# Allegro board T31_QFN_SC4335_38_V1.0_190823E.brd
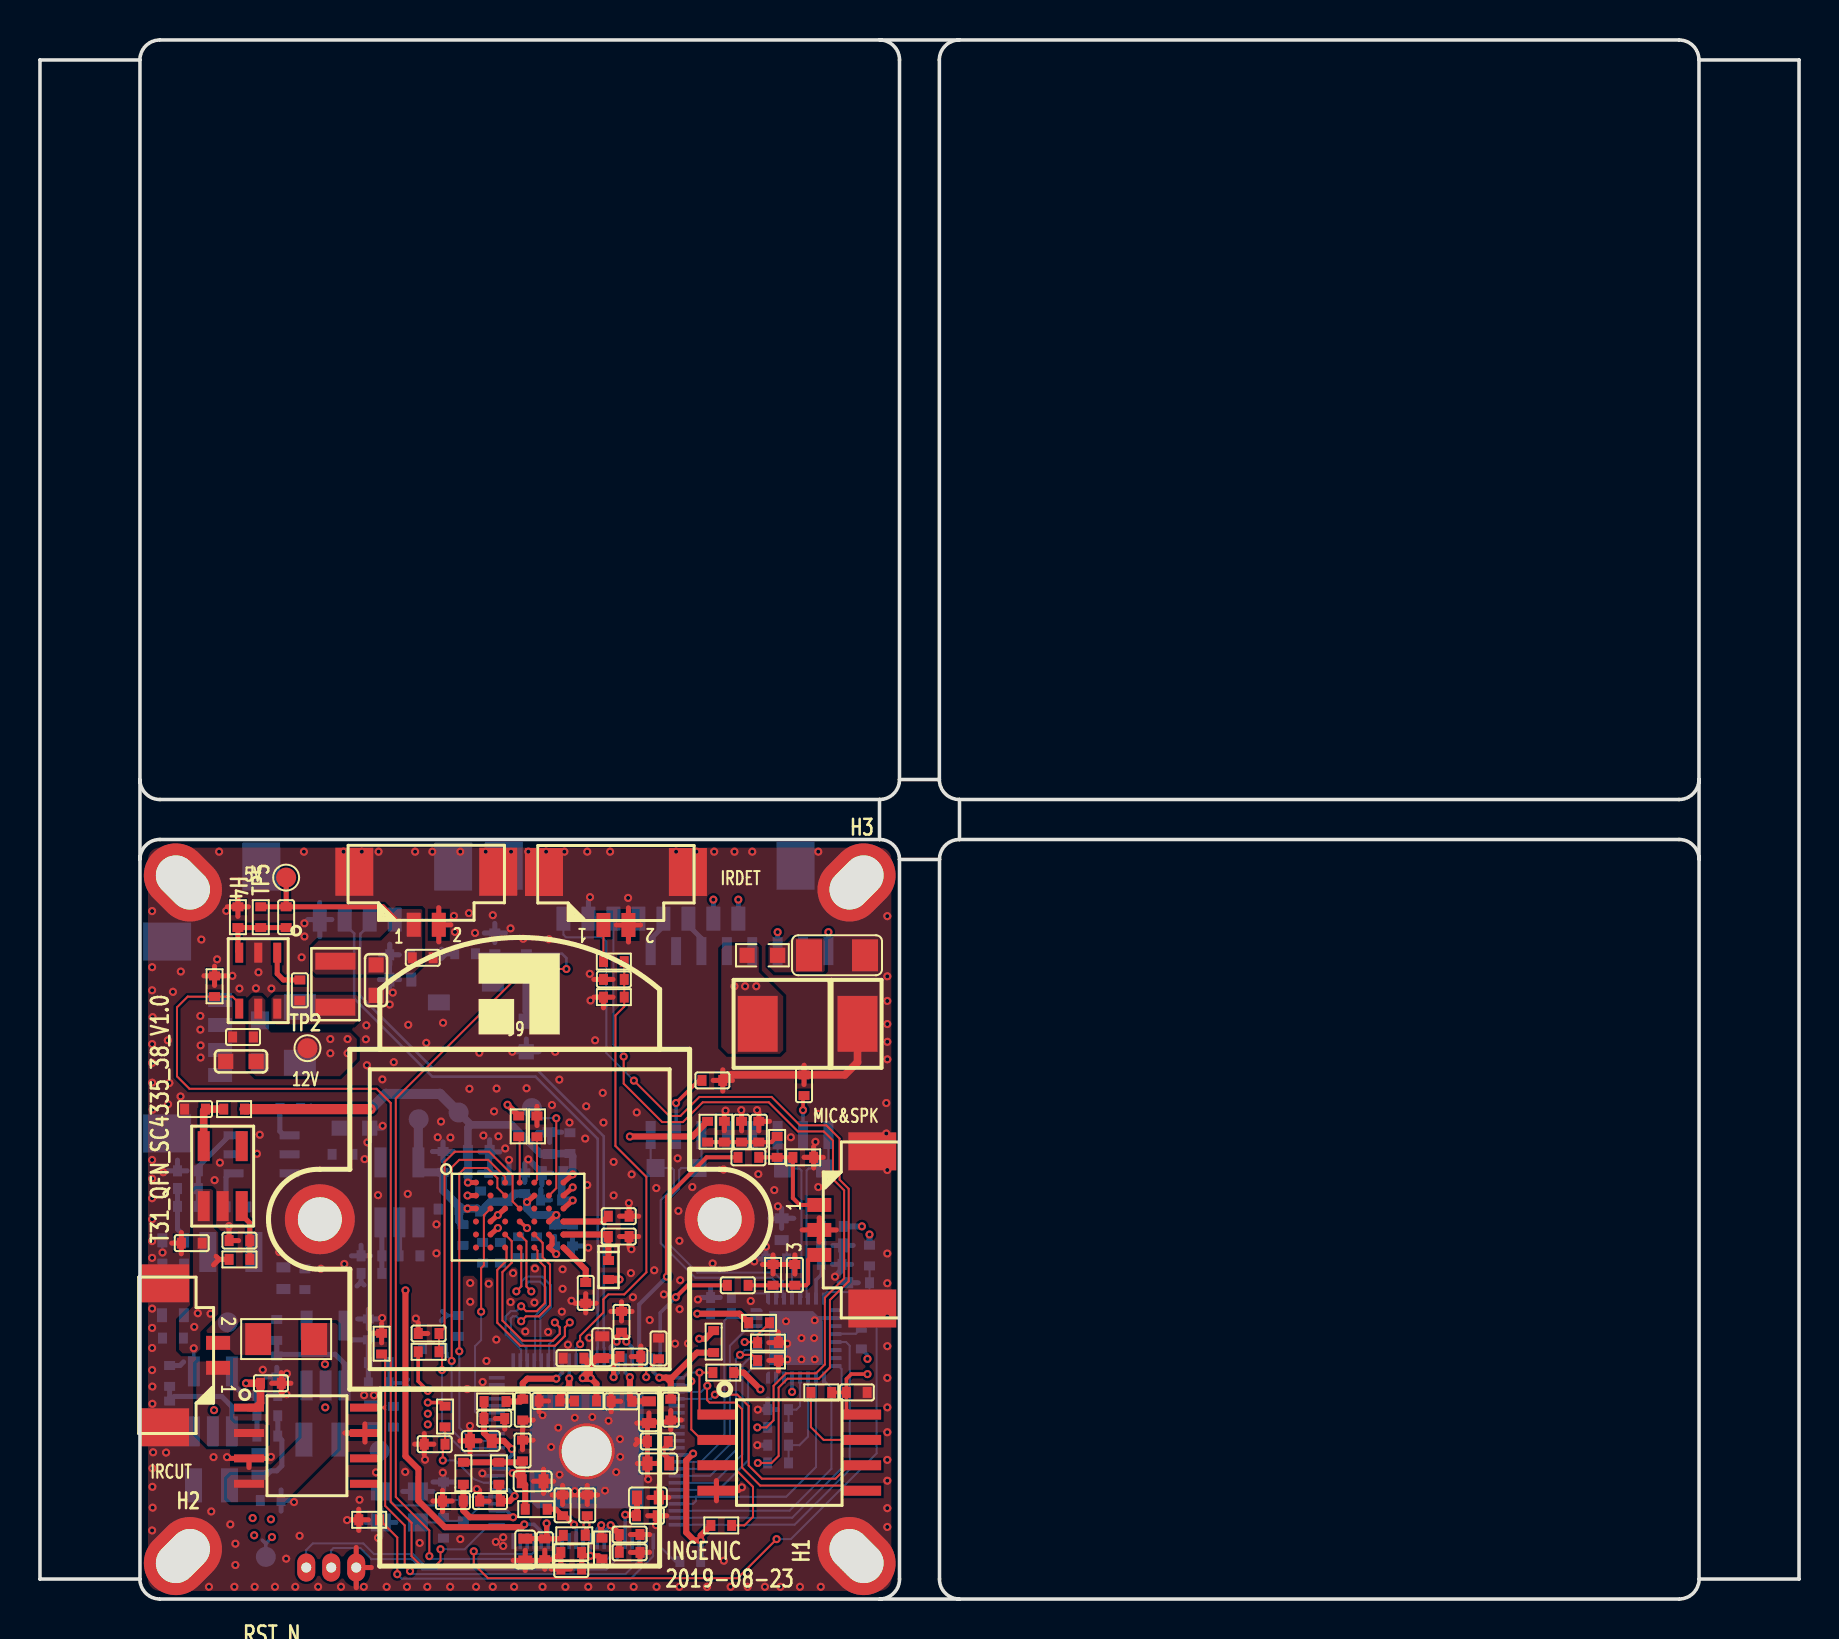
[diagram p0: board, top side]
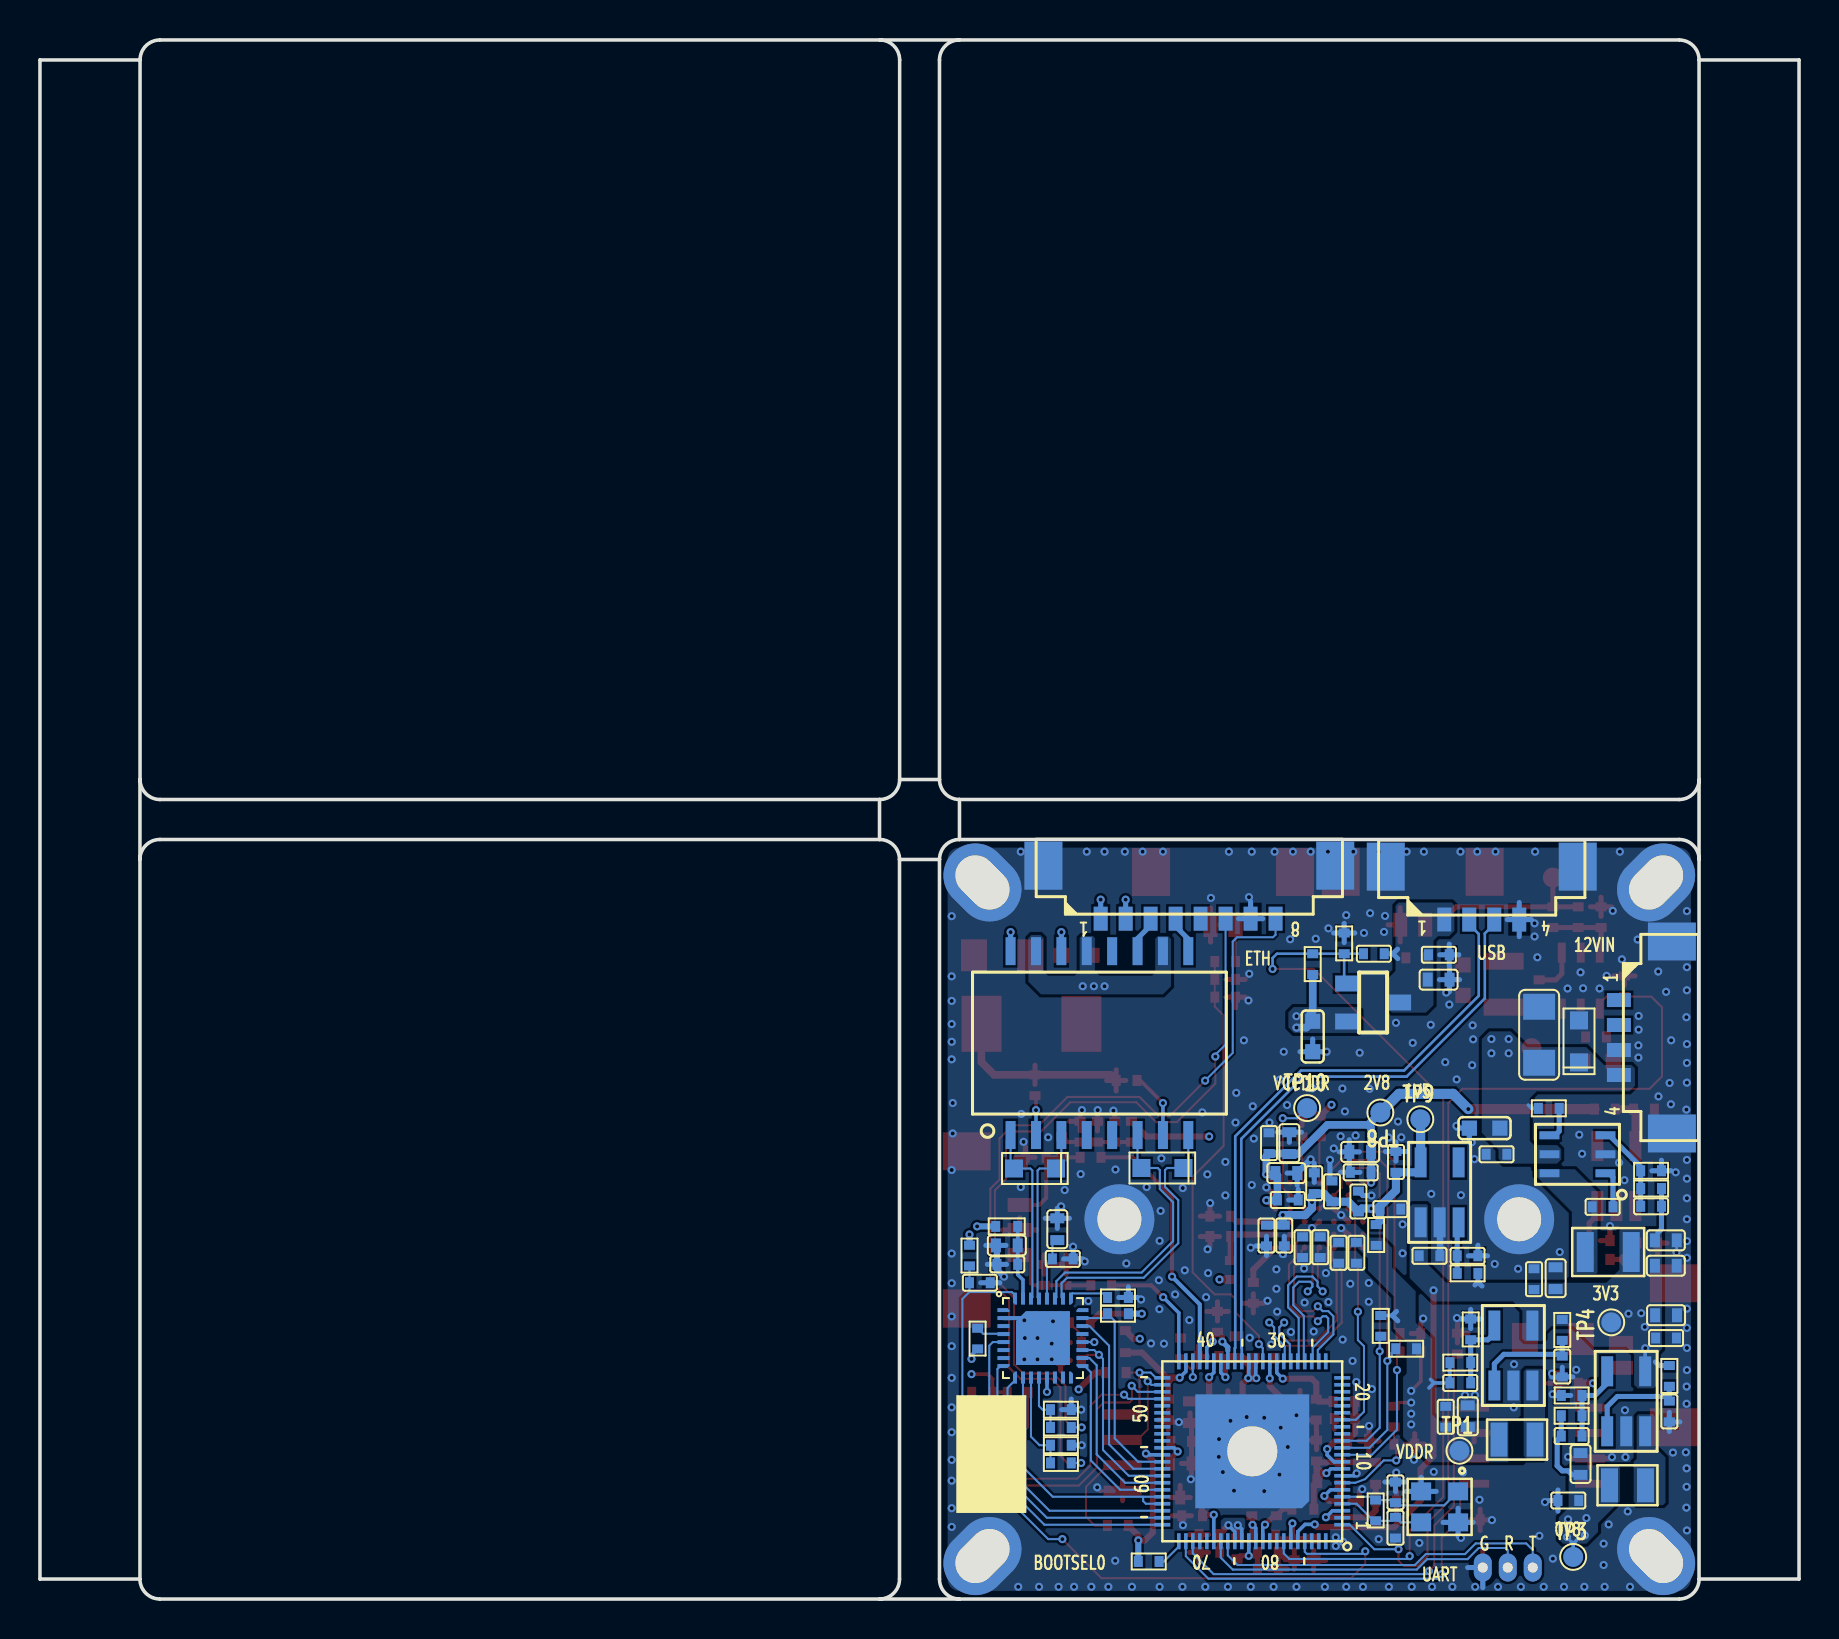
[diagram p1: board, bottom side, seen from below]

Outline 88 x 78 mm; copper layers: TOP, L2_PWR, L3_GND, BOTTOM. Coordinates in mm from the lower left corner of the outline.
Outline path: 5,1 0,1 0,77 5,77 ; 5,1 5,37 ; 5,1 arc(5.29,0.29) 6,0 42,0 ; 5,77 5,41 ; 5,77 arc(5.29,77.71) 6,78 42,78 ; 5,41 5,37 ; 5,41 arc(5.29,40.29) 6,40 42,40 ; 5,37 arc(5.29,37.71) 6,38 42,38 ; 42,40 42,38 ; 42,40 arc(42.71,40.29) 43,41 ; 42,38 arc(42.71,37.71) 43,37 ; 42,78 arc(42.71,77.71) 43,77 43,41 ; 42,78 45.99,78 ; 45.99,78 arc(45.29,77.71) 44.99,77 44.99,41 ; 45.99,78 81.99,78 arc(82.7,77.71) 82.99,77 ; 43,37 43,1 arc(42.71,0.29) 42,0 ; 43,37 45,37 ; 42,0 46,0 ; 46,0 arc(45.29,0.29) 45,1 45,37 ; 46,0 82,0 arc(82.71,0.29) 83,1 ; 43,41 44.99,41 ; 44.99,41 arc(45.29,40.29) 45.99,40 ; 45,37 arc(45.29,37.71) 46,38 ; 46,38 46,39.99 45.99,40 ; 46,38 82,38 arc(82.71,37.71) 83,37 ; 45.99,40 81.99,40 arc(82.7,40.29) 82.99,41 ; 82.99,77 82.99,41 ; 82.99,77 88,77 88,1 83,1 ; 83,37 83,40.99 82.99,41 ; 83,37 83,1

## Design rules (mm)
net group DP3: nets MIPI_DATAN1 MIPI_DATAP1
net group DP4: nets MIPI_DATAN0 MIPI_DATAP0
net group MDI_R: nets MDI_RN MDI_RP
net group MDI_T: nets MDI_TN MDI_TP
net group MIPI_CLK: nets MIPI_CLKN MIPI_CLKP
net group RX: nets RX+ RX-
net group TX: nets TX+ TX-
net group USB90: nets USB_DM0 USB_DP0
net group DEFAULT: nets BOOTSEL0 EXCLKI EXCLKO GMAC_CLKOUT GMAC_CRS_DV GMAC_MDC GMAC_MDIO GMAC_RST_N GMAC_RXD0 GMAC_RXD1 GMAC_TXD0 GMAC_TXD1 GMAC_TXEN IRCUTN IRCUTP LED LINK/ACT MII N3362923 N3362941 N15378796 N15379500 PPRST_N SENSOR_RESET SFC_CS_N SFC_SCLK SPEED
net group PWR: nets AVDD2V8 AVDD_PHY CODEC_AVDD DDR_VREF DDRPLL_AVD08 DDRPLL_AVD18 DVDD1V5 HPOUT MICP N15378850 N15378968 N16752894 PLL_VDDHV VDDIO_OSC VREF VREFH VREFN2
nets with their own width: min track width 0.127; nets GND

## Placement (name value [footprint] x y rotation side)
C1  22pF  [C0402]  16.95 10.81 180 bottom
C2  22uF-1206  [C1206]  13 28.23 90 bottom
C3  10uF  [C0402_E]  12.18 16.05 90 bottom
C4  100nF  [C0402]  13.25 16 90 bottom
C5  100nF  [C0402]  11.85 11.63 270 bottom
C6  10uF  [C0402_E]  16.57 9.14 90 bottom
C7  100nF  [C0402]  17.67 9.12 90 bottom
C8  10nF  [C0402]  9.83 19.62 0 bottom
C9  10uF-0603  [C0603]  15.73 23.56 0 bottom
C10  100nF  [C0402]  15.13 22.25 0 bottom
C11  22pF  [C0402]  11.38 8.15 0 bottom
C12  22pF  [C0402]  7.4 19.65 0 bottom
C13  10uF  [C0402_E]  6.66 16.68 180 bottom
C14  10uF  [C0402_E]  6.66 17.95 180 bottom
C15  10uF  [C0402_E]  6.65 14.2 180 bottom
C16  100nF  [C0402]  6.65 13.06 180 bottom
C17  100nF  [C0402]  6.49 9.38 270 bottom
C18  10uF  [C0402_E]  10.93 6.76 90 bottom
C19  100nF  [C0402]  11.54 4.93 0 bottom
C20  10nF  [C0402]  13 30.45 270 top
C21  10uF-0603  [C0603]  10.05 26.9 180 top
C22  100nF  [C0402]  10.16 28.12 180 top
C23  22pF  [C0402]  12.32 34.11 270 top
C24  10uF-0603  [C0603]  16.81 30.96 270 top
C25  100nF  [C0402]  19.15 32.08 0 top
C26  4.7uF  [C0402]  19.75 7.75 180 top
C28  4.7uF  [C0402]  30.95 12.53 270 top
C29  12pF  [C0402]  20.19 5.33 270 bottom
C30  100nF  [C0402]  40.86 10.34 180 top
C31  12pF  [C0402]  20.19 3.57 90 bottom
C32  10uF  [C0402_E]  24.65 5.89 0 top
C33  100nF  [C0402]  24.14 7.43 90 top
C34  10uF  [C0402_E]  28.13 12.6 90 top
C35  100nF  [C0402]  29.54 12.13 0 top
C36  10uF  [C0402_E]  22.06 7.91 180 top
C37  10uF  [C0402_E]  30.46 9.35 270 top
C38  10uF  [C0402_E]  24.28 2.48 270 top
C39  10uF  [C0402_E]  30.93 6.78 180 top
C40  10uF  [C0402_E]  30.41 5.08 0 top
C41  100nF  [C0402]  30.36 4.17 0 top
C42  100nF  [C0402]  25.26 2.49 270 top
C43  100nF  [C0402]  29.09 9.89 180 top
C44  100nF  [C0402]  30.91 7.89 180 top
C45  100nF  [C0402]  22.73 9.03 0 top
C46  100nF  [C0402]  26.15 4.69 90 top
C47  100nF  [C0402]  27.38 4.69 90 top
C48  100nF  [C0402]  22.51 4.9 180 top
C49  100nF  [C0402]  20.66 4.9 180 top
C50  100nF  [C0402]  26.69 12.05 180 top
C51  4.7uF  [C0402]  31.56 9.47 270 top
C53  100nF  [C0402]  24.15 9.47 270 top
C54  100nF  [C0402]  25.49 9.91 180 top
C55  100nF  [C0402]  29.5 2.34 0 top
C56  100nF  [C0402]  29.09 13.87 90 top
C57  100nF  [C0402]  29.5 3.23 0 top
C60  100nF  [C0402]  26.58 1.5 0 top
C63  1uF  [C0402]  7.76 24.51 180 top
C64  1uF  [C0402]  20.16 21.87 90 bottom
C65  1uF  [C0402]  7.59 17.81 180 top
C66  100nF  [C0402]  9.98 17.93 180 top
C67  1uF  [C0402]  18.49 17.17 180 bottom
C68  100nF  [C0402]  16.58 17.17 180 bottom
C69  1uF  [C0402]  11.55 10.79 0 top
C70  100nF  [C0402]  19.44 13.28 180 top
C71  10uF  [C0402_E]  21.95 22.37 0 bottom
C72  10uF  [C0402_E]  25.65 21.31 180 bottom
C73  10uF  [C0402_E]  25.5 22.81 90 bottom
C74  100nF  [C0402]  26.51 22.81 90 bottom
C75  100nF  [C0402]  25.57 19.96 180 bottom
C76  100nF  [C0402]  21.93 21.35 0 bottom
C77  4.7uF  [C0402]  23.36 20.4 90 bottom
C78  4.7uF  [C0402]  22.04 19.89 90 bottom
C79  4.7uF  [C0402]  25.75 18.19 270 bottom
C80  100nF  [C0402]  20.44 19.51 180 bottom
C81  100nF  [C0402]  24.25 20.8 90 bottom
C82  100nF  [C0402]  26.64 18.19 270 bottom
C83  4.7uF  [C0402]  23.03 17.32 270 bottom
C84  4.7uF  [C0402]  23.95 17.6 270 bottom
C85  100nF  [C0402]  24.84 17.6 270 bottom
C86  100nF  [C0402]  22.14 17.32 270 bottom
C87  2.2uF  [C0402]  28.95 19.15 0 top
C88  2.2uF  [C0402]  28.95 18.14 0 top
C89  2.2uF  [C0402]  27.3 15.32 270 top
C90  100nF  [C0402]  28.71 31 180 top
C91  10uF  [C0402_E]  39.63 17.69 0 bottom
C92  100nF  [C0402]  39.61 16.74 0 bottom
C93  10uF  [C0402_E]  37.11 18.5 90 bottom
C94  100nF  [C0402]  36.83 17.02 180 bottom
C95  100nF  [C0402]  33.64 25.95 180 top
C96  100nF  [C0402]  38.22 25.7 270 top
C97  1nF/2KV-1206  [C1206]  39.87 32.21 180 top
C98  100nF  [C0402]  40.98 15.82 180 bottom
C102  100nF  [C0402]  35.44 22.1 0 top
C103  100nF  [C0402]  35.96 23.38 90 top
C104  4.7uF  [C0402]  35.1 23.38 90 top
C105  2.2uF  [C0402]  34.91 15.7 0 top
C106  1nF  [C0402]  37.77 16.22 90 top
C107  10uF  [C0402_E]  18.03 30.99 180 bottom
C108  100nF  [C0402]  18.02 32.23 180 bottom
C109  100nF  [C0402]  21.27 32.28 0 bottom
C110  22uF-0603  [C0603]  24.33 28.14 270 bottom
D1  BZT52C12S  [SOD323]  11.01 27.9 270 bottom
D2  RB521CS-30  [SOD923_RB521CS-30]  28.44 16.46 90 top
D3  P3100SC  [SMB]  38.4 28.78 180 top
D4  UDD32C03L01  [SOD323]  38.22 21.54 180 bottom
D5  UDD32C03L01  [SOD323]  31.85 21.56 180 bottom
FB1  1000ohm/250mA  [FB0402]  26.73 3.19 180 top
FB2  1000ohm/250mA  [FB0402]  24.82 4.5 180 top
FB3  1000ohm/250mA  [FB0402]  21.18 6.29 90 top
FB4  1000ohm/250mA  [FB0402]  22.96 6.29 90 top
FB5  1000ohm/250mA  [FB0402]  33.7 12.88 270 top
FB6  1000ohm/250mA  [FB0402]  22.77 9.88 180 top
FB7  1000ohm/250mA  [FB0402]  27.29 9.91 0 top
FB9  1000ohm/250mA  [FB0402]  39.64 18.64 0 bottom
H1  MHOBL  [MHOLE_3D0X2D0]  40.85 2.15 90 top
H2  MHOBL  [MHOLE_3D0X2D0]  7.15 2.15 0 top
H3  MHOBL  [MHOLE_3D0X2D0]  40.85 35.85 0 top
H4  MHOBL  [MHOLE_3D0X2D0]  7.15 35.85 270 top
H5  MH_2.8mmP_2.5mmD  [MHOLE_2D8P_2D5H]  27.35 7.39 180 bottom
J1  CON4 1.25mm LT  [CON4-1D25-LT]  6.91 28.09 90 bottom
J3  CON2 1.25mm LT  [CON2-1D25-LT]  6.81 12.19 270 top
J4  CON2 1.25mm LT  [CON2-1D25-LT]  28.81 35.82 180 top
J5  CON2 1.25mm LT  [CON2-1D25-LT]  19.33 35.83 180 top
J6  CON8 1.25mm LT  [CON8-1D25-LT]  30.5 36.14 0 bottom
J9  LENS Holder  [CAM_HOLDER]  24 19 0 top
J10  CON3 1.25mm LT  [CON3-1D25-LT]  41.09 18.47 90 top
J11  CON4 1.25mm LT  [CON4-1D25-LT]  15.87 36.09 0 bottom
J12  CON3 1.25mm LC  [CON3-1D25-LC]  14.57 2.02 0 bottom
L1  2.2uH/1.3A-2016  [L2016]  14.11 7.98 180 bottom
L2  4.7uH/1.4A-2520  [L2520]  9.55 17.36 180 bottom
L3  2.2uH/1.3A-2016  [L2016]  8.58 5.69 180 bottom
L4  4.7uH/1.4A-2520  [L2520]  14.78 30.76 90 top
NOREF  -  []  5.32 37.73 0 top
NOREF#2  -  []  41.27 158.18 0 top
NOREF#3  -  []  -189.11 -122.58 0 top
NOREF#4  -  []  6 0 90 top
NOREF#5  -  []  5 1 0 top
NOREF#6  -  []  -23.41 -7.53 0 top
NOREF#7  -  []  -41.62 136.12 0 top
NOREF#8  -  []  -8.39 3.19 180 bottom
Q1  WPM3401  [SOT23]  21.31 29.84 270 bottom
R1  100K  [R0402]  11.85 13.46 270 bottom
R2  200K/1%  [R0402]  16.95 11.83 180 bottom
R3  100K/1%  [R0402]  16.43 13.49 270 bottom
R4  100K  [R0402]  12.52 24.55 180 bottom
R5  100K  [R0402]  6.49 11.16 270 bottom
R6  150K/1%  [R0402]  7.4 20.54 0 bottom
R7  40.2K/1%  [R0402]  11.38 9.17 0 bottom
R8  33.2K/1%  [R0402]  7.4 21.42 0 bottom
R9  120K/1%  [R0402]  11.38 10.19 180 bottom
R11  200K/1%  [R0402]  11.05 34.11 270 top
R12  27K/1%  [R0402]  9.9 34.11 270 top
R13  100K  [R0402]  32.53 1.88 180 bottom
R15  100K  [R0402]  20.27 9.13 270 top
R16  10K  [R0402]  34.08 3.68 0 top
R17  10K  [R0402]  34.18 11.33 180 top
R18  10K  [R0402]  39.09 10.34 0 top
R23  100K/1%  [R0402]  28.11 2.53 90 top
R24  100K/1%  [R0402]  26.58 2.34 0 top
R25  0R  [R0402]  9.71 24.51 180 top
R26  0R  [R0402]  21.15 18.21 90 bottom
R27  10K  [R0402]  9.98 16.99 0 top
R28  10K  [R0402]  16.58 16.29 0 bottom
R29  10K  [R0402]  17.09 12.78 90 top
R30  4.7K  [R0402]  20.93 13.67 270 bottom
R31  4.7K  [R0402]  19.66 12.52 0 bottom
R32  10K  [R0402]  16.47 3.96 180 top
R33  10K  [R0402]  23.95 23.65 270 top
R34  10K  [R0402]  19.44 12.37 0 top
R35  10K  [R0402]  24.86 23.65 270 top
R36  10R/1%-1206  [R1206]  12.32 13 180 top
R37  20K  [R0402]  28.71 31.89 180 top
R38  10K  [R0402]  28.71 30.11 0 top
R39  10K  [R0402]  41.09 13.03 270 bottom
R40  10K  [R0402]  35.97 13.82 180 top
R41  10K  [R0402]  36.42 12.83 0 top
R42  10K  [R0402]  36.42 11.94 0 top
R43  10K  [R0402]  36.93 7.7 180 bottom
R44  10K  [R0402]  34.07 14.27 180 bottom
R45  10K  [R0402]  36.93 9.47 180 bottom
R46  75R/1%-0603  [R0603]  36.14 32.21 180 top
R47  10K  [R0402]  41.5 17.18 90 bottom
R48  300R  [R0402]  36.93 8.59 0 bottom
R49  300R  [R0402]  36.93 6.81 0 bottom
R50  6.19K/1%  [R0402]  34.07 15.09 180 bottom
R54  2.2K  [R0402]  36.88 22.62 90 top
R55  2.2K  [R0402]  33.4 23.38 90 top
R56  2.2K  [R0402]  34.24 23.38 270 top
R57  2.2K  [R0402]  38.18 22.1 180 top
R59  470K  [R0402]  36.67 16.22 270 top
R60  100K  [R0402]  8.73 30.66 270 top
R61  100K  [R0402]  24.33 31.76 270 bottom
R64  2.2K  [R0402]  22.75 32.8 270 bottom
R65  1M  [R0402]  21.18 4.43 90 bottom
TP1  TP  [TEST_SMD]  16.99 7.42 180 bottom
TP2  TP  [TEST_SMD]  13.38 27.56 0 top
TP3  TP  [TEST_SMD]  11.3 2.11 180 bottom
TP4  TP  [TEST_SMD]  9.39 13.84 90 bottom
TP5  TP  [TEST_SMD]  12.32 36.09 90 top
TP8  TP  [TEST_SMD]  20.94 24.34 0 bottom
TP9  TP  [TEST_SMD]  18.94 24 180 bottom
TP10  TP  [TEST_SMD]  24.61 24.56 180 bottom
U1  LN5058  [SOT23-5]  14.29 12.18 180 bottom
U2  ETA8120  [SOT23-6]  11.08 22.25 0 bottom
U3  LN5058  [SOT23-5]  8.65 9.89 180 bottom
U4  ETA8120  [SOT23-6]  10.92 30.94 270 top
U5  T31 QFN88  [QFN88_0D35_T31]  27.35 7.39 0 bottom
U6  GD25Q127CSIG  [WSOP8_1D27]  37.49 7.33 0 top
U7  SC4335  [BGA41_0D73X0D65_SC4335]  23.92 19.11 0 top
U8  S-1339D28  [SOT23-5]  9.14 21.16 0 top
U9  S-1339D15  [SOT23-5]  17.98 20.35 180 bottom
U10  BA6208  [SOP8_1D27]  13.36 7.67 0 top
U11  IP101GR  [QFN32_0D4_IP101GR]  37.82 13.06 180 bottom
U12  FC1680C  [QFP16_1D27]  35 27.81 90 bottom
Y1  24M 2016  [CRY_2D5X2D0]  17.98 4.61 0 bottom

## Library data of the parts
C1-C26 C28-C51 C53-C57 C60 C63-C98 C102-C110 = CAP
D1 = DIODE_WY
D2 = DIODE
D3 = P3100
D4 D5 = UDD32C03
FB1-FB7 FB9 = BEAD
H1-H5 = MHOLE1
J1 J11 = CON_4x1
J3-J5 = CON_2X1
J6 = CON_8x1
J9 = CUTS
J10 = CON_3X1
J12 = CON_3X1_1.25LC
L1-L4 = INDUCTOR
Q1 = P_MOS
R1-R9 R11-R13 R15-R18 R23-R50 R54-R57 R59-R61 R64 R65 = RES
TP1-TP5 TP8-TP10 = TP
U1 U3 = SY8088
U2 U4 = SY8120
U5 = T31_QFN88
U6 = SPI_NOR
U7 = SC4335
U8 U9 = SGM2019
U10 = BA6208
U11 = IP101GR
U12 = FC1680C
Y1 = XTAL_P4

## Footprints (pads in the part's own frame, mm; a bottom-side part is the same pattern mirrored in y, then rotated)
BGA41_0D73X0D65_SC4335
  round 0.3 smd: A1(-2.111,1.73) A2(-1.38,1.73) A3(-0.65,1.73) A4(0.08,1.73) A5(0.809,1.73) A6(1.539,1.73) A7(2.269,1.73) B1(-2.111,1.079) B2(-1.38,1.079) B3(-0.65,1.079) B5(0.809,1.079) B6(1.539,1.079) B7(2.269,1.079) C1(-2.111,0.429) C2(-1.38,0.429) C3(-0.65,0.429) C4(0.08,0.429) C5(0.809,0.429) C6(1.539,0.429) C7(2.269,0.429) D1(-2.111,-0.22) D2(-1.38,-0.22) D3(-0.65,-0.22) D4(0.08,-0.22) D5(0.809,-0.22) D6(1.539,-0.22) D7(2.269,-0.22) E1(-2.111,-0.871) E2(-1.38,-0.871) E3(-0.65,-0.871) E4(0.08,-0.871) E5(0.809,-0.871) E6(1.539,-0.871) E7(2.269,-0.871) F1(-2.111,-1.52) F2(-1.38,-1.52) F3(-0.65,-1.52) F4(0.08,-1.52) F5(0.809,-1.52) F6(1.539,-1.52) F7(2.269,-1.52)
C0402
  rect 0.45x0.55 smd: 1(-0.52,0) 2(0.52,0)
C0402_E
  rect 0.5x0.7 smd: 1(-0.545,0) 2(0.545,0)
C0603
  rect 0.76x0.76 smd: 1(-0.762,0) 2(0.762,0)
C1206
  rect 1.3x1.6 smd: 1(-1.4,0) 2(1.4,0)
CAM_HOLDER
  round 3.5 hole 2.2: 1(-10,0) 2(10,0)
CON2-1D25-LT
  rect 0.7x1.2 smd: 1(0.625,2.1) 2(-0.625,2.1)
  rect 1.9x2.4 smd: 3(-3.6,-0.55) 4(3.6,-0.55)
CON3-1D25-LC
  oval 0.9x1.4 hole 0.5: 1(1.25,0.45) 2(0,0.45) 3(-1.25,0.45)
CON3-1D25-LT
  rect 0.7x1.2 smd: 1(1.25,2.1) 2(0,2.1) 3(-1.25,2.1)
  rect 1.9x2.4 smd: 4(-3.93,-0.55) 5(3.93,-0.55)
CON4-1D25-LT
  rect 0.7x1.2 smd: 1(1.875,2.1) 2(0.625,2.1) 3(-0.625,2.1) 4(-1.875,2.1)
  rect 1.9x2.4 smd: 5(-4.8,-0.55) 6(4.8,-0.55)
CON8-1D25-LT
  rect 0.7x1.2 smd: 1(4.435,2.1) 2(3.185,2.1) 3(1.935,2.1) 4(0.685,2.1) 5(-0.565,2.1) 6(-1.815,2.1) 7(-3.065,2.1) 8(-4.315,2.1)
  rect 1.9x2.4 smd: 9(-7.3,-0.55) 10(7.3,-0.55)
CRY_2D5X2D0
  rect 1x0.9 smd: 1(-0.925,-0.775) 2(0.925,-0.775) 3(0.925,0.775) 4(-0.925,0.775)
FB0402
  rect 0.45x0.55 smd: 1(-0.55,0) 2(0.55,0)
L2016
  rect 0.85x1.7 smd: 1(0.9,0) 2(-0.9,0)
L2520
  rect 0.85x2 smd: 1(-1.15,0) 2(1.15,0)
MHOLE_2D8P_2D5H
  round 2.8 hole 2.5: 1(0,0)
MHOLE_3D0X2D0
  oval 4.2x3.2 hole 3x2 rot 45: 1(0,0)
QFN32_0D4_IP101GR
  custom 0.599x0.198 smd: 1(-1.975,1.4) 8(-1.975,-1.4) 17(1.975,-1.4) 24(1.975,1.4)
  rect 0.6x0.2 smd: 2(-1.975,1) 3(-1.975,0.6) 4(-1.975,0.2) 5(-1.975,-0.2) 6(-1.975,-0.6) 7(-1.975,-1) 18(1.975,-1) 19(1.975,-0.6) 20(1.975,-0.2) 21(1.975,0.2) 22(1.975,0.6) 23(1.975,1)
  custom 0.198x0.599 smd: 9(-1.4,-1.975) 16(1.4,-1.975) 25(1.4,1.975) 32(-1.4,1.975)
  rect 0.2x0.6 smd: 10(-1,-1.975) 11(-0.6,-1.975) 12(-0.2,-1.975) 13(0.2,-1.975) 14(0.6,-1.975) 15(1,-1.975) 26(1,1.975) 27(0.6,1.975) 28(0.2,1.975) 29(-0.2,1.975) 30(-0.6,1.975) 31(-1,1.975)
  custom 2.697x2.697 smd: 33(0,0)
QFN88_0D35_T31
  rect 0.8x0.18 smd: 1(-4.5,3.675) 2(-4.5,3.325) 3(-4.5,2.975) 4(-4.5,2.625) 5(-4.5,2.275) 6(-4.5,1.925) 7(-4.5,1.575) 8(-4.5,1.225) 9(-4.5,0.875) 10(-4.5,0.525) 11(-4.5,0.175) 12(-4.5,-0.175) 13(-4.5,-0.525) 14(-4.5,-0.875) 15(-4.5,-1.225) 16(-4.5,-1.575) 17(-4.5,-1.925) 18(-4.5,-2.275) 19(-4.5,-2.625) 20(-4.5,-2.975) 21(-4.5,-3.325) 22(-4.5,-3.675) 45(4.5,-3.675) 46(4.5,-3.325) 47(4.5,-2.975) 48(4.5,-2.625) 49(4.5,-2.275) 50(4.5,-1.925) 51(4.5,-1.575) 52(4.5,-1.225) 53(4.5,-0.875) 54(4.5,-0.525) 55(4.5,-0.175) 56(4.5,0.175) 57(4.5,0.525) 58(4.5,0.875) 59(4.5,1.225) 60(4.5,1.575) 61(4.5,1.925) 62(4.5,2.275) 63(4.5,2.625) 64(4.5,2.975) 65(4.5,3.325) 66(4.5,3.675)
  rect 0.18x0.8 smd: 23(-3.675,-4.5) 24(-3.325,-4.5) 25(-2.975,-4.5) 26(-2.625,-4.5) 27(-2.275,-4.5) 28(-1.925,-4.5) 29(-1.575,-4.5) 30(-1.225,-4.5) 31(-0.875,-4.5) 32(-0.525,-4.5) 33(-0.175,-4.5) 34(0.175,-4.5) 35(0.525,-4.5) 36(0.875,-4.5) 37(1.225,-4.5) 38(1.575,-4.5) 39(1.925,-4.5) 40(2.275,-4.5) 41(2.625,-4.5) 42(2.975,-4.5) 43(3.325,-4.5) 44(3.675,-4.5) 67(3.675,4.5) 68(3.325,4.5) 69(2.975,4.5) 70(2.625,4.5) 71(2.275,4.5) 72(1.925,4.5) 73(1.575,4.5) 74(1.225,4.5) 75(0.875,4.5) 76(0.525,4.5) 77(0.175,4.5) 78(-0.175,4.5) 79(-0.525,4.5) 80(-0.875,4.5) 81(-1.225,4.5) 82(-1.575,4.5) 83(-1.925,4.5) 84(-2.275,4.5) 85(-2.625,4.5) 86(-2.975,4.5) 87(-3.325,4.5) 88(-3.675,4.5)
  custom 5.7x5.7 smd: 89(0,0)
QFP16_1D27
  rect 1.4x0.5 smd: 1(-4.6,4.445) 2(-4.6,3.175) 3(-4.6,1.905) 4(-4.6,0.635) 5(-4.6,-0.635) 6(-4.6,-1.905) 7(-4.6,-3.175) 8(-4.6,-4.445) 9(4.6,-4.445) 10(4.6,-3.175) 11(4.6,-1.905) 12(4.6,-0.635) 13(4.6,0.635) 14(4.6,1.905) 15(4.6,3.175) 16(4.6,4.445)
R0402
  rect 0.45x0.55 smd: 1(-0.52,0) 2(0.52,0)
R0603
  rect 0.76x0.76 smd: 1(-0.762,0) 2(0.762,0)
R1206
  rect 1.3x1.6 smd: 1(-1.4,0) 2(1.4,0)
SMB
  rect 2x2.8 smd: 1(2.5,0) 2(-2.5,0)
SOD323
  rect 0.9x0.9 smd: 1(-1.05,0) 2(1.05,0)
SOD923_RB521CS-30
  rect 0.45x0.55 smd: 1(-0.475,0) 2(0.475,0)
SOP8_1D27
  rect 1.5x0.4 smd: 1(-2.9,1.905) 2(-2.9,0.635) 3(-2.9,-0.635) 4(-2.9,-1.905) 5(2.9,-1.905) 6(2.9,-0.635) 7(2.9,0.635) 8(2.9,1.905)
SOT23
  rect 0.8x1.1 smd: 1(-0.95,-1.35) 2(0.95,-1.35) 3(0,1.35)
SOT23-5
  rect 0.6x1.5 smd: 1(-0.95,-1.5) 2(0,-1.5) 3(0.95,-1.5) 4(0.95,1.5) 5(-0.95,1.5)
SOT23-6
  rect 1x0.4 smd: 1(-1.4,0.95) 2(-1.4,0) 3(-1.4,-0.95) 4(1.4,-0.95) 5(1.4,0) 6(1.4,0.95)
TEST_SMD
  round 1 smd: 1(0,0)
WSOP8_1D27
  rect 1.9x0.5 smd: 1(-3.645,1.905) 2(-3.645,0.635) 3(-3.645,-0.635) 4(-3.645,-1.905) 5(3.645,-1.905) 6(3.645,-0.635) 7(3.645,0.635) 8(3.645,1.905)

## Nets
AVDD2V8: C71.1 C72.1 C73.1 C74.1 C75.1 C76.1 D2.1(ANODE) R25.1 R55.2 TP8.1 U7.A1(AVDD_1) U7.A7(AVDD_2) U7.C7(AVDD_3)
AVDD_PHY: C91.1 C92.1 FB9.1 U11.31(AVDD33)
DVDD1V5: C64.1 C77.1 C78.1 C79.1 C80.1 C81.1 C82.1 R26.2 TP9.1 U7.B5(DVDD_1) U7.C1(DVDD_2) U7.D6(DVDD_3) U9.5(VOUT)
GND: C2.2 C3.2 C4.2 C5.2 C6.2 C7.2 C9.2 C10.2 C13.2 C14.2 C15.2 C16.2 C17.2 C18.2 C19.2 C21.2 C22.2 C24.2 C25.2 C26.2 C28.1 C29.1 C30.1 C31.1 C32.2 C33.2 C34.2 C35.2 C36.2 C37.2 C38.2 C39.2 C40.2 C41.2 C42.2 C43.2 C44.2 C45.2 C46.2 C47.2 C48.2 C49.2 C50.2 C51.2 C53.2 C54.2 C55.2 C56.2 C57.2 C60.1 C63.2 C64.2 C65.2 C66.2 C67.2 C68.2 C69.2 C70.2 C71.2 C72.2 C73.2 C74.2 C75.2 C76.2 C77.2 C78.2 C79.2 C80.2 C81.2 C82.2 C83.2 C84.2 C85.2 C86.2 C87.2 C88.2 C89.2 C90.2 C91.2 C92.2 C93.2 C94.2 C95.1 C96.1 C97.1 C98.2 C103.2 C104.2 C106.2 C107.2 C108.2 C110.2 D1.1 D3.2 H1.1(A) H2.1(A) H3.1(A) H4.1(A) H5.1(A) J1.3 J1.5(S1) J1.6(S2) J3.3(S1) J3.4(S2) J4.2 J4.3(S1) J4.4(S2) J5.2 J5.3(S1) J5.4(S2) J6.7 J6.9(S1) J6.10(S2) J9.1(SHD1) J9.2(SHD2) J10.2 J10.4(S1) J10.5(S2) J11.4 J11.5(S1) J11.6(S2) J12.1 R3.1 R8.1 R9.1 R12.1 R24.1 R29.2 R32.2 R35.1 R38.1 R41.2 R42.2 R43.2 R45.2 R50.2 R56.1 R57.1 R59.1 R60.1 R64.1 U1.2(GND) U2.2(GND) U3.2(GND) U4.2(GND) U5.8(EFUSE_AVD) U5.89(E-PAD_VSS) U6.4(GND) U7.B1(AGND_1) U7.B7(AGND_2) U7.C3(DOGND_1) U7.D2(DOGND_2) U7.E6(DOGND_3) U7.F6(DOGND_4) U8.2(GND) U9.2(GND) U10.3(GND0) U10.7(GND1) U11.2(X1) U11.33(GND_EP) Y1.2 Y1.4
VCC_0V8: C11.2 C18.1 C19.1 C36.1 C37.1 C38.1 C39.1 C40.1 C41.1 C42.1 C43.1 C44.1 C45.1 FB1.2 FB6.2 L3.2 R7.2 TP3.1 U5.10(VDD_1) U5.39(VDD_2) U5.55(VDD_3) U5.72(VDD_4) U5.83(VDD_5)
VCC_5V: C23.1 C24.1 C25.1 J5.1 L4.2 R11.1 TP5.1
VCC_12V: C2.1 C9.1 C10.1 C21.1 C22.1 C69.1 D1.2 J1.4 R4.1 TP2.1 U2.5(VIN) U4.5(VIN) U10.1(VCC)
VDDIO_OSC: C49.1 FB3.1 U5.3(VDDIO_OSC)
ADC_AVDD: C1.1 C6.1 C7.1 C32.1 C33.1 C34.1 C35.1 C50.1 C55.1 C57.1 C83.1 C84.1 C85.1 C86.1 FB2.2 FB3.2 FB4.2 FB5.1 FB7.2 L1.2 R2.1 R15.1 R23.2 R26.1 R30.1 R31.1 R33.1 R34.1 TP1.1 U5.9(VDDIO0) U5.33(ADC_VREF) U5.34(ADC_AVDD) U5.38(USB_AVD18) U5.75(DDRVDD) U5.76(VDDMEM) U7.D4(DOVDD_1) U7.E2(DOVDD_2)
AIN: C102.2 J10.1 R54.1 R57.2
AOUT: C105.2 C106.1 J10.3 R59.2
BOOTSEL0: R13.2 U5.67(BOOT_SEL0_PC00)
CODEC_AVDD: C51.1 FB5.2 U5.43(CODEC_AVDD)
DDR_VREF: C60.2 R23.1 R24.2 U5.77(VREF)
DDRPLL_AVD08: C47.1 FB1.1 U5.78(DDR_PLLVCCD)
DDRPLL_AVD18: C46.1 FB2.1 U5.79(DDR_PLLVCCA)
EXCLKI: C29.2 R65.2 U5.5(EXCLK_XI) Y1.1
EXCLKO: C31.2 R65.1 U5.4(EXCLK_XO) Y1.3
GMAC_CLKOUT: U5.62(GMAC_TXCLK_SLCD_D0_PB06) U5.63(GMAC_PHY_CLK_SLCD_D1_PB07) U11.10(TXCLK/50M_CLKI)
GMAC_CRS_DV: R42.1 U5.59(GMAC_RXDV_MSC1_CMD_I2S_SDTI_SLC) U11.19(RXDV/CRS_DV/FX_HEN)
GMAC_MDC: U5.58(GMAC_MDCK_MSC1_D0_I2S_SDTO_SLCD) U11.22(MDC)
GMAC_MDIO: R44.1 U5.57(GMAC_MDIO_MSC1_D1_SLCD_D5_PB11) U11.23(MDIO)
GMAC_RST_N: C98.1 R47.1 U5.85(PWM3_DMIC_CLK_SSI1_DR_PB28) U11.32(RESET_N)
GMAC_RXD0: U5.60(GMAC_RXD0_I2S_DAC_LRCK_SLCD_WR_) U11.18(RXD0)
GMAC_RXD1: U5.61(GMAC_RXD1_SLCD_TE_PB16) U11.17(RXD1)
GMAC_TXD0: U5.64(GMAC_TXD0_MSC1_D2_I2S_ADC_LRCK_) U11.9(TXD0)
GMAC_TXD1: U5.65(GMAC_TXD1_MSC1_D3_I2S_DAC_MCLK_) U11.8(TXD1)
GMAC_TXEN: U5.66(GMAC_TXEN_MSC1_CLK_I2S_ADC_MCLK) U11.5(TXEN)
HPOUT: C105.1 U5.44(HPOUT)
I2C0_SCK: R31.2 U5.12(SMB0_SCK_SD7_PA13) U7.A3(SCL)
I2C0_SDA: R30.2 U5.13(SMB0_SDA_SD6_PA12) U7.B3(SDA)
IR_DET: C90.1 R37.1 R38.2 U5.32(ADC_AUX0)
IRCUTN: R32.1 U5.68(UART0_RTS_I2S_DAC_BCLK_SLCD_DC_) U10.5(BIN)
IRCUTP: R29.1 U5.69(UART0_CTS_I2S_ADC_BCLK_SLCD_CS_) U10.8(AIN)
IRLED_EN: R60.2 U4.4(EN) U5.1(PWM0_SSI1_DT_PB17)
LED: R40.1 R41.1 U11.20(CRS/LEDMOD)
LINK/ACT: R43.1 R49.2 U11.11(LED0/PHY_AD0)
MDI_RN: D5.2 U11.26(MDI_RN) U12.8(RD-/TD-)
MDI_RP: D5.1 U11.27(MDI_RP) U12.6(RD+/TD+)
MDI_TN: D4.2 U11.29(MDI_TN) U12.3(TD-/RD-)
MDI_TP: D4.1 U11.30(MDI_TP) U12.1(TD+/RD+)
MICP: C102.1 U5.41(MICLP)
MII: R39.1 U11.4(COL/RMII)
MIPI_AVD08: C53.1 FB6.1 U5.30(MIPI_AVD08)
MIPI_AVD18: C54.1 FB7.1 U5.31(MIPI_AVD18)
MIPI_CLKN: U5.26(DVP_D3_MIPI_CLKN) U7.E4(D<7>/MCN)
MIPI_CLKP: U5.27(DVP_D2_MIPI_CLKP) U7.F4(PCLK/MCP)
MIPI_DATAN0: U5.24(DVP_D5_MIPI_DATAN0) U7.F5(D<8>/MD0N)
MIPI_DATAN1: U5.28(DVP_D1_MIPI_DATAN1) U7.E3(D<5>/MD1N)
MIPI_DATAP0: U5.25(DVP_D4_MIPI_DATAP0) U7.E5(D<9>/MD0P)
MIPI_DATAP1: U5.29(DVP_D0_MIPI_DATAP1) U7.F3(D<6>/MD1P)
MIPI_MCLK: U5.16(DVP_MCLK_SA1_PA15) U7.C2(EXTCLK)
PLL_VDDHV: C48.1 FB4.1 U5.6(PLL_VDDHV)
PPRST_N: C26.1 R15.2 U5.7(PPRST_)
PWDN: R33.2 U7.A4(PWDNB)
RX+: J6.3 U12.11(RX+/TX+)
RX-: J6.4 U12.9(RX-/TX-)
SENSOR_RESET: C70.1 R34.2 U5.11(SA2_PA18) U7.C4(XSHUTDN)
SFC_CS_N: R17.2 U5.45(SFC_CE0_PA28) U6.1(C\S\)
SFC_DR: U5.46(SFC_DR_PA24) U6.2(SO/SIO1)
SFC_DT: U5.47(SFC_DT_PA23) U6.5(SI/SIO0)
SFC_SCLK: U5.48(SFC_CLK_PA27) U6.6(SCLK)
SID: R35.2 U7.A5(SID)
SPEED: R45.1 R48.2 U11.12(LED3/PHY_AD3)
TX+: J6.1 U12.16(TX+/RX+)
TX-: J6.2 U12.14(TX-/RX-)
UART1_RXD: J12.2 U5.73(UART1_RXD_TMS_PB24)
UART1_TXD: J12.3 U5.74(UART1_TXD_TCK_PB23)
USB_AVD33: C3.1 C4.1 C12.1 C13.1 C14.1 C15.1 C16.1 C30.2 C56.1 C65.1 C67.1 C110.1 FB9.2 L2.2 Q1.2(SOURCE) R1.1 R5.1 R6.1 R13.1 R16.1 R17.1 R18.2 R27.1 R28.1 R39.2 R40.2 R44.2 R47.2 R61.2 TP4.1 U1.4(IN) U3.4(IN) U5.37(USB_AVD33) U5.40(VDDIO2) U5.56(VDDIO1_1) U5.84(VDDIO1_2) U6.8(VCC) U8.1(VIN) U9.1(VIN) U11.13(VDD_IO)
USB_DM0: J11.3 U5.35(USB0PN)
USB_DP0: J11.2 U5.36(USB0PP)
VREF: C87.1 U7.D7(VREFN)
VREFH: C88.1 D2.2(CATHODE) U7.E7(VREFH)
VREFN2: C89.1 U7.F7(VREFN2)
WIFI_3V3: C107.1 C108.1 C109.1 J11.1 Q1.3(DRAIN)
WIFI_PWR_EN_N: C109.2 Q1.1(GATE) R61.1 R64.2 U5.82(DMIC_DAT0_SSI1_CLK_PB29)
N3362923: J6.6 R48.1
N3362941: J6.8 R49.1
N15378796: C93.1 C94.1 U11.28(REGOUT)
N15378850: C96.2 U12.2(CT1)
N15378882: D3.1 R46.2 U12.10(CT3) U12.13(MCT) U12.15(CT4)
N15378968: C95.2 U12.7(CT2)
N15379500: R50.1 U11.25(ISET)
N15379944: C97.2 R46.1
N16529866: R16.2 U6.3(W\P\/SIO2)
N16529875: R18.1 U6.7(R\E\S\E\T\/SIO3)
N16751930: C5.1 R1.2 U1.1(EN)
N16752052: C1.2 R2.2 R3.2 U1.5(FB)
N16752064: L1.1 U1.3(LX)
N16752894: C17.1 R5.2 U3.1(EN)
N16752970: C11.1 R7.1 R9.2 U3.5(FB)
N16752974: L3.1 U3.3(LX)
N16754551: C12.2 R6.2 R8.2 U2.3(FB)
N16754607: R4.2 U2.4(EN)
N16754611: C8.1 U2.1(BS)
N16754627: C8.2 L2.1 U2.6(LX)
N16770518: TP10.1 U7.B6(EFSYNC)
N16781005: C68.1 R28.2 U9.3(EN)
N16781075: C63.1 R25.2 U8.5(VOUT)
N16781177: C66.1 R27.2 U8.3(EN)
N16783416: R36.1 U10.4(AOUT)
N16783424: J3.1 U10.2(BOUT)
N16783667: J3.2 R36.2
N16785783: C23.2 R11.2 R12.2 U4.3(FB)
N16785813: C20.1 U4.1(BS)
N16785821: C20.2 L4.1 U4.6(LX)
N16789132: J4.1 R37.2
N16798960: C103.1 C104.1 R54.2 R55.1 R56.2
N16830595: C28.2 U5.42(VCM)

Pads without a net: J1 1 2; J6 5; U5 2 14 15 17 18 19 20 21 22 23 49 50 51 52 53 54 70 71 80 81 86 87 88; U7 A2 A6 B2 C5 C6 D1 D3 D5 E1 F1 F2; U8 4; U9 4; U10 6; U11 1 3 6 7 14 15 16 21 24; U12 4 5 12

## Via types
v1: diameter 0.406, hole 0.203, TOP to BOTTOM, 409 vias

## Routing (per net, layer and track width the routed paths; a pad name or vN(x,y) marks a point on that pad's centre or on a via; arc(x,y) is an arc through that point)
AVDD2V8: length 39.3
  TOP w0.254: U7.A7 v1(26.65,21.25) ; U7.A1 v1(21.41,20.84) ; U7.C7 v1(26.65,19.95)
  TOP w0.305: v1(29.51,23.14) 32.64,23.14 R55.2
  TOP w0.381: D2.1 v1(28.99,15.99)
  TOP w0.508: v1(16.54,24.51) R25.1
  L2_PWR w0.305: v1(29.51,23.14) 28.54,23.14 v1(26.65,21.25) ; v1(28.99,15.99) 28.99,17.6 v1(26.65,19.95)
  BOTTOM w0.381: v1(26.65,19.95) 26.11,19.95 C75.1 26.09,21.21 C72.1 26.26,21.25 v1(26.65,21.25) 26.65,22.15 C74.1 25.52,22.29 C73.1 25.05,22.26 23.59,23.72 21.56,23.72 ; 21.56,23.72 21.41,23.57 C71.1 C76.1 v1(21.41,20.84) ; 21.56,23.72 TP8.1
  BOTTOM w0.508: TP8.1 20.01,25.27 17.31,25.27 v1(16.54,24.51)
AVDD_PHY: length 3.7
  BOTTOM w0.178: FB9.1 C91.1 C92.1 39.09,16.23 38.82,15.97 U11.31
DVDD1V5: length 15.8
  TOP w0.254: U7.D6 v1(25.82,19.21) ; U7.B5 v1(24.36,19.86) ; U7.C1 v1(21.39,19.54)
  BOTTOM w0.406: U9.5 18.93,21.53 19.11,21.35 C64.1 20.16,20.45 20.96,19.65 C80.1 ; C80.1 20.96,18.92 R26.2 ; C80.1 21.36,19.51 v1(21.39,19.54) 21.88,19.54 C78.1 22.55,19.88 C77.1 23.77,20.28 C81.1 24.36,20.17 v1(24.36,19.86) 24.36,19.55 24.7,19.21 v1(25.82,19.21) 25.82,18.78 C79.1 C82.1
  BOTTOM w0.457: U9.5 18.93,23.99 TP9.1
GND: length 180.1
  TOP w0.127: U6.4 34.94,5.42
  TOP w0.254: 36.14,16.74 R59.1 ; R59.1 36.67,17.22 ; R59.1 37.2,16.74 ; R59.1 36.67,16.26 ; 24.14,7.47 C33.2 ; C33.2 24.67,7.95 ; C33.2 24.14,8.43 ; 25.62,5.21 C46.2 ; C46.2 26.15,5.69 ; C46.2 26.15,4.73 ; C46.2 26.67,5.21 ; C42.2 25.69,1.97 R24.1 C60.1 ; C42.2 25.22,1.93 C38.2 ; C42.2 25.26,2.45 ; C42.2 25.26,1.49 ; R41.2 37.42,12.83 ; R41.2 36.46,12.83 ; R41.2 36.94,13.36 ; 30.4,4.17 C41.2 ; C41.2 30.88,3.64 ; C41.2 31.36,4.17 ; 38.13,18.47 J10.2 ; J10.2 38.99,17.86 ; J10.2 39.84,18.47 ; J10.2 38.99,19.07 ; C37.2 30.39,8.73 C44.2 ; C37.2 29.86,8.8 ; C37.2 30.51,8.85 v1(31.02,8.85) 31.45,8.85 C51.2 ; C37.2 30.46,9.31 ; C35.2 30.06,12.66 ; C35.2 30.06,11.6 ; C35.2 29.58,12.13 ; 15.25,8.31 U10.7 ; U10.7 16.26,8.76 ; U10.7 16.26,7.85 ; R12.1 10.43,34.63 ; R12.1 9.9,34.15 ; R12.1 9.37,34.63 ; R12.1 9.9,35.11 ; C39.2 30.89,6.78 ; C39.2 C44.2 ; C39.2 30.39,6.18 ; C39.2 29.88,6.78 ; 29.09,13.91 C56.2 ; C56.2 29.09,14.87 ; C56.2 28.56,14.39 ; C56.2 29.62,14.39 ; 38.23,22.1 R57.1 ; R57.1 38.7,22.63 ; R57.1 39.18,22.1 ; R57.1 38.7,21.57 ; C69.2 12.07,11.32 ; C69.2 12.55,10.79 ; C69.2 11.59,10.79 ; C69.2 12.07,10.27 ; C95.1 34.64,25.95 ; C95.1 33.68,25.95 ; C95.1 34.16,25.42 ; C95.1 34.16,26.48 ; U7.D2 v1(22.9,19.21) U7.C3 ; C87.2 29.47,19.68 ; C87.2 29.95,19.15 ; C87.2 28.99,19.15 ; 37.77,16.26 C106.2 ; C106.2 37.77,17.22 ; C106.2 37.24,16.74 ; 25.19,5.29 C32.2 ; C32.2 24.69,5.89 ; C32.2 25.19,6.5 ; C32.2 25.7,5.89 ; R29.2 17.09,13.78 ; R29.2 16.56,13.3 ; R29.2 17.09,12.82 ; R32.2 15.95,4.49 ; R32.2 15.47,3.96 ; R32.2 15.95,3.43 ; R32.2 16.43,3.96 ; 30.5,3.23 C57.2 29.54,3.23 ; 8.73,30.7 R60.1 ; R60.1 8.2,31.18 ; R60.1 9.26,31.18 ; R60.1 8.73,31.66 ; 29.44,32.87 J4.2 ; J4.2 29.44,34.58 ; J4.2 28.84,33.72 ; J4.2 30.04,33.72 ; 31.56,8.48 C51.2 ; C51.2 32.08,8.95 ; C51.2 31.56,9.43 ; 27.71,31 C90.2 28.67,31 ; 35.1,23.42 C104.2 35.1,24.38 ; C47.2 27.38,5.69 ; C47.2 26.85,5.21 ; C47.2 27.91,5.21 ; C47.2 27.38,4.73 ; U7.B1 v1(21.39,20.19) ; 22.77,9.03 C45.2 23.25,8.5 ; 38.22,26.7 C96.1 38.22,25.75 ; C40.2 30.96,5.68 ; C40.2 31.46,5.08 ; C40.2 30.45,5.08 ; C65.2 7.07,18.33 ; C65.2 6.59,17.81 ; C65.2 7.07,17.28 ; C43.2 29.05,9.89 ; C43.2 28.57,9.36 ; C43.2 28.57,10.42 ; C38.2 24.28,2.44 ; C38.2 24.28,1.43 ; C38.2 23.67,1.93 ; U7.B7 v1(26.65,20.6) ; 19.95,32.88 J5.2 ; J5.2 20.55,33.73 ; J5.2 19.95,34.59 ; 24.86,23.69 R35.1 24.86,24.65 ; 19.66,4.9 C49.2 ; C49.2 20.62,4.9 ; C49.2 20.14,4.37 ; C49.2 20.14,5.43 ; C44.2 29.96,7.89 ; 29.79,7.72 29.96,7.89 ; 29.96,7.89 29.85,7.99 ; C26.2 19.7,7.75 ; C26.2 19.23,7.22 ; C26.2 19.23,8.28 ; C26.2 18.75,7.75 ; C89.2 27.3,15.28 ; C89.2 26.77,14.8 ; C89.2 27.3,14.32 ; C89.2 27.83,14.8 ; 21.01,7.91 C36.2 ; C36.2 21.51,7.31 ; C36.2 21.51,8.52 ; C36.2 22.02,7.91 ; U7.E6 25.62,18.08 25.62,17.74 U7.F6 v1(25.82,17.26) ; J12.1 16.58,1.57 ; J12.1 15.82,0.57 ; J12.1 15.82,2.58 ; 33.84,5.92 U6.4 33.84,4.92 ; 24.15,8.48 C53.2 24.68,8.95 ; U10.3 11.46,7.04 ; U10.3 10.46,6.58 ; U10.3 9.45,7.04 ; 36.46,11.94 R42.2 ; R42.2 36.94,11.41 ; R42.2 37.42,11.94 ; 34.94,5.42 v1(35.11,5.59) ; 21.99,5.43 C48.2 22.47,4.9 ; 34.24,24.38 R56.1 34.24,23.42 ; C60.1 26.54,1.5 ; C60.1 25.58,1.5 ; C103.2 36.49,23.9 ; C103.2 35.96,24.38 ; C103.2 35.96,23.42 ; 9.94,17.93 C66.2 9.46,18.46 ; 28.19,29.58 R38.1 ; R38.1 27.71,30.11 ; R38.1 28.67,30.11 ; 19.4,13.28 C70.2 18.92,13.81 ; 29.47,17.61 C88.2 ; C88.2 28.99,18.14 ; C88.2 29.95,18.14 ; C54.2 24.97,10.44 ; C54.2 25.44,9.91 ; C54.2 24.97,9.38 ; 29.54,2.34 C55.2 ; C55.2 30.02,1.81 ; C55.2 30.5,2.34
  TOP w0.381: D3.2 40.9,26.86 40.27,26.22 C96.1 34.44,26.22 C95.1
  L2_PWR w0.254: 15.82,0.57 J12.1 16.58,1.57
  L3_GND w0.254: 15.82,0.57 J12.1 ; J12.1 15.82,2.58 ; J12.1 16.58,1.57
  BOTTOM w0.127: C14.2 6.12,17.35 v1(6.13,17.34)
  BOTTOM w0.178: U5.8 22.25,6.17 v1(22.13,6.29)
  BOTTOM w0.203: v1(38.76,13.94) 38.87,14.06 U11.2
  BOTTOM w0.254: 14,33.14 J11.4 ; J11.4 13.39,33.99 ; J11.4 14.6,33.99 ; J11.4 14,34.85 ; 12.37,10.19 R9.1 11.42,10.19 ; C68.2 16.54,17.17 ; C68.2 15.58,17.17 ; C68.2 16.06,17.7 ; 15.9,14.01 R3.1 ; R3.1 16.43,14.49 ; R3.1 16.43,13.53 ; R3.1 16.95,14.01 ; 17.02,32.23 C108.2 ; C108.2 17.5,31.7 ; C108.2 17.98,32.23 ; C108.2 17.5,32.76 ; 33.07,15.09 R50.2 ; R50.2 34.03,15.09 ; R50.2 33.55,15.62 ; R45.2 36.41,10 ; R45.2 v1(35.91,9.47) ; R45.2 36.89,9.47 ; C19.2 12.54,4.93 ; C19.2 12.06,4.4 ; C19.2 12.06,5.46 ; 19.66,5.85 C29.1 ; C29.1 20.19,6.33 ; C29.1 20.19,5.38 ; C29.1 20.72,5.85 ; R43.2 v1(35.89,7.7) ; C82.2 26.64,18.15 ; C82.2 26.64,17.19 ; C82.2 27.17,17.67 ; 17.13,23.56 C9.2 16.49,22.92 ; C5.2 11.85,11.59 ; C5.2 11.32,11.11 ; C5.2 12.37,11.11 ; 25.75,17.19 C79.2 25.75,18.15 ; 23.7,27.38 C110.2 ; C110.2 24.96,27.38 ; C110.2 24.33,28.02 ; 39.67,17.69 C91.2 40.68,17.69 ; C107.2 17.99,30.99 ; C107.2 17.49,31.59 ; C107.2 16.98,30.99 ; C107.2 17.49,30.38 ; v1(21.39,20.19) 21.82,20.19 C78.2 ; 35.83,17.02 C94.2 ; C94.2 36.31,17.55 ; C94.2 36.79,17.02 ; 25.05,20.49 C75.2 25.53,19.96 ; 25.5,22.85 C73.2 ; C73.2 24.89,23.35 ; C73.2 26.1,23.35 ; 17.05,3.13 Y1.4 ; Y1.4 16.3,3.84 ; Y1.4 17.05,4.54 ; Y1.4 17.81,3.84 ; 15.82,0.57 J12.1 16.58,1.57 ; C64.2 20.69,22.39 ; C64.2 20.16,22.87 ; C64.2 19.63,22.39 ; C64.2 20.16,21.91 ; C93.2 37.71,19.05 ; C93.2 36.5,19.05 ; C93.2 37.11,19.55 ; C93.2 37.11,18.54 ; J6.7 28.04,34.04 ; J6.7 26.83,34.04 ; J6.7 27.44,34.89 ; R64.1 23.28,33.32 ; R64.1 22.23,33.32 ; R64.1 22.75,32.84 ; R64.1 22.75,33.8 ; C17.2 6.49,9.34 ; C17.2 6.49,8.38 ; C17.2 5.96,8.86 ; C71.2 22.5,21.4 C76.2 ; C71.2 23,22.37 ; C71.2 22.5,22.98 ; C71.2 21.99,22.37 ; 40.94,15.82 C98.2 39.98,15.82 ; Y1.2 19.66,5.39 ; Y1.2 18.15,5.39 ; Y1.2 18.9,6.09 ; 24.25,20.84 C81.2 24.25,21.8 ; 21.97,21.35 C76.2 ; C76.2 22.93,21.35 ; R8.1 6.88,21.95 ; R8.1 7.36,21.42 ; R8.1 6.4,21.42 ; 25.11,20.71 C72.2 25.61,21.31 ; 39.65,16.74 C92.2 40.61,16.74 ; v1(23.47,21.97) 23.47,21.02 C77.2
  BOTTOM w0.305: C72.2 25.11,21.32 v1(24.43,22) ; v1(39.77,16.13) 40.13,16.48 C92.2 40.13,17.64 C91.2 ; U9.2 17.97,18.83 C67.2
  vias: v1(5.61,34.42) v1(5.61,31.61) v1(5.61,30.46) v1(5.63,29.11) v1(5.61,27.76) v1(5.61,26.82) v1(5.61,25.83) v1(5.63,24.49) v1(5.61,21.97) v1(5.61,21.03) v1(5.61,20.05) v1(5.61,19) v1(5.61,17.91) v1(5.61,17.07) v1(5.61,14.53) v1(5.61,13.57) v1(5.61,12.56) v1(5.61,11.46) v1(5.62,10.63) v1(5.62,9.77) v1(5.62,6.54) v1(5.62,5.61) v1(5.63,4.57) v1(5.61,3.43) v1(5.66,7.34) v1(6.17,21.35) v1(6.31,7.33) v1(6.4,27.95) v1(6.41,24.75) v1(6.47,25.82) v1(6.65,30.38) v1(7.04,31.39) v1(7.03,25.15) v1(8.02,29.17) v1(8.02,28.49) v1(8.04,27.7) v1(8.04,27.09) v1(8.07,32.99) v1(8.45,0.61) v1(8.57,4.38) v1(8.73,20.95) v1(8.71,9.45) v1(8.68,7.1) v1(8.86,32) v1(8.96,37.39) v1(9,21.83) v1(9.32,34.43) v1(9.36,7.1) v1(9.46,18.66) v1(9.52,3.73) v1(9.62,31.18) v1(9.72,0.61) v1(9.78,2.77) v1(9.78,1.7) v1(9.98,30.54) v1(10.74,0.61) v1(10.8,30.56) v1(10.93,31.36) v1(10.85,22.28) v1(10.99,23.23) v1(11.15,11.47) v1(11.58,30.54) v1(11.55,7.11) v1(11.76,0.61) v1(11.97,17.36) v1(12.33,10.25) v1(12.32,2.02) v1(12.35,11.28) v1(12.71,4.85) v1(12.77,0.61) v1(12.99,3.16) v1(13.09,32.11) v1(13.2,37.39) v1(13.23,33.81) v1(13.23,33.15) v1(13.92,0.61) v1(14.06,16.52) v1(14.26,11.75) v1(14.27,9.59) v1(15.06,0.61) v1(15.19,37.39) v1(15.22,16.76) v1(15.36,3.95) v1(15.99,4.97) v1(16.1,37.39) v1(16.24,22.01) v1(16.21,10.2) v1(16.2,0.61) v1(16.33,28.7) v1(16.3,28) v1(16.35,26.71) v1(16.38,22.85) v1(16.71,10.2) v1(16.81,6.34) v1(16.94,37.39) v1(16.91,20.21) v1(16.91,3.06) v1(17.13,26) v1(17.14,23.67) v1(17.12,14.06) v1(17.34,0.61) v1(17.5,29.74) v1(17.65,30.34) v1(17.7,26.86) v1(18.27,6.36) v1(18.42,28.73) v1(18.4,20.27) v1(18.36,0.61) v1(18.77,37.39) v1(18.8,14.03) v1(19,2.81) v1(19.33,27.83) v1(19.26,6.97) v1(19.38,0.61) v1(19.63,37.39) v1(19.83,18.75) v1(19.83,17.3) v1(19.9,23.1) v1(20.06,23.89) v1(20.16,28.83) v1(20.15,6.32) v1(20.53,23.09) v1(20.52,0.61) v1(20.71,34.18) v1(20.76,33.38) v1(21.03,37.39) v1(21.03,3) v1(21.37,10.5) v1(21.46,34.32) v1(21.48,25.53) v1(21.52,15.81) v1(21.52,14.87) v1(21.51,8.66) v1(21.76,33.32) v1(21.81,0.61) v1(21.85,5.5) v1(21.98,27.33) v1(22.14,10.86) v1(22.18,23.19) v1(22.3,37.39) v1(22.34,11.91) v1(22.45,15.77) v1(22.65,34.21) v1(22.72,24.4) v1(22.65,0.61) v1(22.84,25.54) v1(22.83,12.98) v1(22.81,2.86) v1(22.93,23.15) v1(23.17,3.09) v1(23.17,2.65) v1(23.28,22.54) v1(23.54,33.55) v1(23.54,14.86) v1(23.57,37.39) v1(23.63,27.38) v1(23.67,16.31) v1(23.72,0.61) v1(24.18,33.03) v1(24.34,25.55) v1(24.28,13.39) v1(24.43,37.39) v1(24.74,14.83) v1(24.76,16.54) v1(25.14,9.19) v1(25.14,0.61) v1(25.32,37.39) v1(25.42,13.36) v1(25.46,33.01) v1(25.61,24.71) v1(25.57,7.61) v1(25.78,27.38) v1(25.93,8.57) v1(25.98,25.98) v1(25.99,6.22) v1(26.15,16.5) v1(26.15,15.52) v1(26.11,14.38) v1(26.23,37.39) v1(26.29,0.61) v1(26.41,12.73) v1(26.49,23.84) v1(26.59,14.92) v1(26.76,9.07) v1(26.76,5.4) v1(27.33,24.65) v1(27.28,23.04) v1(27.38,37.39) v1(27.38,20.71) v1(27.43,17.58) v1(27.43,0.61) v1(27.52,35.12) v1(27.5,31.28) v1(27.54,29.95) v1(27.48,13.07) v1(27.63,9.11) v1(27.77,27.95) v1(28.15,25.32) v1(28.19,23.84) v1(28.27,5.42) v1(28.44,8.92) v1(28.52,37.39) v1(28.57,0.61) v1(28.7,21.87) v1(28.7,20.19) v1(28.83,6.35) v1(29.02,8) v1(29.03,7.11) v1(29.42,35.08) v1(29.46,19.81) v1(29.6,21.25) v1(29.59,17.5) v1(29.56,16.31) v1(29.66,15.1) v1(29.7,0.61) v1(29.85,24.35) v1(30.43,5.99) v1(30.5,13.96) v1(30.73,16.45) v1(30.83,20.56) v1(30.82,3.7) v1(30.84,0.61) v1(31.21,15.24) v1(31.82,37.39) v1(31.77,12.78) v1(31.9,22.05) v1(31.94,19.42) v1(31.99,17.92) v1(32.03,15.95) v1(32,14.5) v1(31.99,0.61) v1(32.42,12.79) v1(32.64,20.61) v1(32.84,37.39) v1(32.91,14.99) v1(33.37,0.61) v1(33.73,37.39) v1(33.65,16.79) v1(34.2,21.49) v1(34.21,1.92) v1(34.3,24.43) v1(34.55,0.61) v1(34.74,37.39) v1(35.09,24.46) v1(35.4,0.61) v1(35.63,37.39) v1(35.56,14.91) v1(35.73,16.89) v1(35.87,24.46) v1(35.94,21.26) v1(36.32,17.63) v1(36.27,0.61) v1(36.74,20.46) v1(36.92,19.65) v1(37.04,0.61) v1(37.32,13.89) v1(37.38,12.78) v1(37.38,11.99) v1(37.56,23.1) v1(38.02,0.61) v1(38.1,13.06) v1(38.1,11.99) v1(38.73,13.06) v1(38.79,22.87) v1(38.76,11.99) v1(38.93,37.39) v1(38.91,24.27) v1(38.93,20.61) v1(39.06,0.61) v1(42.34,24.82) v1(42.34,23.29) v1(42.39,34.16) v1(42.39,31.15) v1(42.39,29.92) v1(42.39,28.77) v1(42.39,27.88) v1(42.39,27) v1(42.39,21.46) v1(42.39,17.29) v1(42.39,15.8) v1(42.39,14.14) v1(42.39,12.65) v1(42.39,11.06) v1(42.39,9.59) v1(42.39,8.35) v1(42.39,6.96) v1(42.39,5.92) v1(42.39,4.55) v1(42.39,3.61)
VCC_0V8: length 20.9
  TOP w0.254: C42.1 25.24,3.02 C38.1 ; C42.1 26,3.01 FB1.2 ; C42.1 25.35,3.1 v1(25.35,3.78) ; C39.1 31.48,6.99 v1(31.09,7.38) 31.43,7.72 C44.1
  TOP w0.305: FB6.2 22.22,9.04 C45.1 22.21,8.3 C36.1 23.2,7.91 v1(23.61,7.51) ; v1(29.28,4.22) 29.79,4.22 C41.1 29.87,4.19 C40.1 ; C37.1 29.61,9.89 C43.1 29.51,9.99 v1(29.51,11.1)
  BOTTOM w0.178: v1(25.35,3.78) 25.43,3.7 U5.83 ; 11.3,2.77 11.12,2.95 ; 11.3,2.77 11.43,2.9 ; 11.3,2.77 TP3.1 ; v1(23.61,7.51) 23.61,7.21 23.26,6.87 U5.10 ; U5.55 31.27,7.57 v1(31.09,7.38) ; v1(29.51,11.1) 29.28,11.33 U5.39 ; U5.72 v1(29.28,4.22)
  BOTTOM w0.254: 11.35,6.21 11.55,6.41 11.85,6.41 12.1,6.67 12.1,7.95 C11.2 R7.2
  vias: v1(10.64,4.05) v1(10.71,3.19) v1(11.55,3.99) v1(11.6,3.1)
VCC_5V: length 8.4
  TOP w0.254: R11.1 C23.1 ; C23.1 TP5.1 ; C23.1 17.15,34.63 17.78,34.01
VCC_12V: length 26.9
  TOP w0.381: v1(10.31,10.79) C69.1 11.03,9.8 10.8,9.58 U10.1
  L2_PWR w0.508: v1(10.31,10.79) 8.2,10.79 6.75,12.24 6.75,22.02 12.04,27.3 v1(14.52,27.3)
  BOTTOM w0.178: 13.55,24.71 13.38,24.55 R4.1
  vias: v1(14.52,28.02) v1(15.39,28.02) v1(15.39,27.3)
VDDIO_OSC: length 4.9
  TOP w0.305: v1(23.67,4.09) 21.51,4.09 21.18,4.42 C49.1 FB3.1
  BOTTOM w0.178: v1(23.67,4.09) 23.34,4.42 U5.3
ADC_AVDD: length 42.2
  TOP w0.178: v1(19.4,10.41) 18.92,10.9 R34.1 ; v1(19.4,9.83) 20.09,9.83 R15.1 ; 24.14,6.79 C33.1 ; U7.D4 v1(24.36,18.56)
  TOP w0.254: U7.E2 v1(22.9,18.56) ; C34.1 28.2,12.13 C35.1 28.7,11.81 v1(28.7,11.1)
  TOP w0.305: R23.2 28.08,3.09 v1(28.08,3.69) ; 23.8,6.3 23.83,6.3 24.14,6.6 ; 23.8,6.3 v1(23.64,6.3) ; 23.8,6.3 24.1,5.99 C32.1 ; FB3.2 FB4.2 24.07,6.84 C33.1 ; v1(27.55,11.05) 27.84,10.77 FB7.2 ; FB2.2 24.27,5.72 C32.1 ; R33.1 v1(23.39,24.73) ; v1(32.98,13.02) 33.3,13.02 FB5.1 ; 24.14,6.6 24.14,5.93 C32.1 ; 24.14,6.6 24.14,6.79 ; C55.1 C57.1 28.98,3.26 v1(28.55,3.69)
  TOP w0.381: 27.45,11.35 27.45,11.15 v1(27.55,11.05) v1(27.15,11.05) 27.45,11.35 ; 27.45,11.35 27.45,11.67 ; 27.45,11.67 27.83,12.05 C34.1 ; 27.45,11.67 27.45,11.81 C50.1
  L2_PWR w0.305: v1(32.98,13.02) 32.98,12.52 32.67,12.22 29.05,12.22 28.53,11.7 ; v1(23.39,24.73) 25.12,23 25.12,19.31 v1(24.36,18.56)
  BOTTOM w0.178: 18.26,10.81 18.51,10.56 ; 18.26,10.81 C1.1 R2.1 ; 18.26,10.81 18.44,10.99 ; v1(28.08,3.69) 27.88,3.49 U5.76 ; v1(27.15,11.05) 27.18,11.08 U5.33 ; U5.9 23.43,6.52 v1(23.64,6.3) ; v1(27.55,11.05) 27.53,11.08 U5.34 ; U5.38 28.93,11.33 v1(28.7,11.1) ; v1(28.55,3.69) 28.23,3.37 U5.75 ; R30.1 20.34,14.19
  BOTTOM w0.254: 20.14,14.39 20.34,14.19 20.07,13.92
  vias: v1(19.4,9.27) v1(19.4,8.74)
AIN: length 5.2
  TOP w0.203: C102.2 R54.1 R57.2 37.66,20.07 38.01,19.72 J10.1
AOUT: length 4.9
  TOP w0.203: C105.2 R59.2 C106.1 38.32,15.7 38.43,15.8 38.43,16.97 38.67,17.22 J10.3
BOOTSEL0: length 1.6
  BOTTOM w0.102: U5.67 31.03,2.62 31.77,1.88 R13.2
CODEC_AVDD: length 5.4
  TOP w0.305: C51.1 31.56,10.85 31.33,11.07 ; 31.33,11.07 31.62,11.07 32.87,12.33 FB5.2 ; 31.33,11.07 v1(30.98,11.07)
  BOTTOM w0.178: v1(30.98,11.07) 30.68,11.38 U5.43
DDR_VREF: length 2.7
  TOP w0.254: R23.1 27.96,2.16 v1(27.53,2.16) 27.27,2.16 R24.2 C60.2
  BOTTOM w0.178: U5.77 v1(27.53,2.16)
DDRPLL_AVD08: length 1.9
  TOP w0.254: FB1.1 27.34,3.25 v1(27.34,3.71) 27.34,4.13 C47.1
  BOTTOM w0.178: U5.78 27.18,3.55 v1(27.34,3.71)
DDRPLL_AVD18: length 2.5
  TOP w0.254: v1(26.72,3.72) 26.27,4.17 C46.1 25.82,4.5 FB2.1
  BOTTOM w0.178: U5.79 26.83,3.61 v1(26.72,3.72)
EXCLKI: length 6.3
  BOTTOM w0.102: U5.5 21.34,5.12 R65.2 20.33,4.95 C29.2 20.06,4.69 17.75,4.69 Y1.1
EXCLKO: length 4.5
  BOTTOM w0.102: U5.4 22.14,4.77 21.28,3.91 R65.1 20.37,3.91 C31.2 19.94,3.84 Y1.3
GMAC_CLKOUT: length 13.3
  BOTTOM w0.102: 32.81,5.12 32.81,4.9 32.68,4.77 U5.63 ; 32.81,5.12 37.33,5.12 38.82,6.61 U11.10 ; 32.81,5.12 U5.62
GMAC_CRS_DV: length 10.3
  TOP w0.102: R42.1 35.62,12.22 v1(35.02,12.22)
  BOTTOM w0.102: U11.19 35.26,12.46 v1(35.02,12.22) 34.82,12.01 34.82,7.45 33.53,6.17 U5.59
GMAC_MDC: length 9.8
  BOTTOM w0.102: U5.58 33.3,6.52 34.51,7.73 34.51,12.67 35.5,13.66 U11.22
GMAC_MDIO: length 10.6
  BOTTOM w0.102: U11.23 34.81,14.06 34.59,14.27 34.24,13.92 34.24,8.04 33.06,6.87 U5.57
GMAC_RST_N: length 39.4
  TOP w0.102: v1(21.7,2.39) 21.7,1.75 22.41,1.04 34.9,1.04 v1(36.85,3)
  BOTTOM w0.102: 41.51,15.35 39.38,15.35 39.22,15.2 U11.32 ; 41.51,15.35 41.5,15.37 C98.1 R47.1 ; 41.51,15.35 41.86,15.01 41.86,7.29 37.56,3 v1(36.85,3) ; v1(21.7,2.39) 21.83,2.26 24.63,2.26 24.73,2.36 U5.85
GMAC_RXD0: length 9.2
  BOTTOM w0.102: U5.60 33.71,5.82 35.14,7.24 35.14,11.7 35.5,12.06 U11.18
GMAC_RXD1: length 9.1
  BOTTOM w0.102: U5.61 33.96,5.47 35.43,6.93 35.43,11.35 35.73,11.66 U11.17
GMAC_TXD0: length 13.3
  BOTTOM w0.102: U11.9 39.22,10.94 39.59,10.57 39.59,6.52 37.5,4.42 U5.64
GMAC_TXD1: length 14.6
  BOTTOM w0.102: U5.65 37.63,4.07 40.1,6.54 40.1,11.51 39.95,11.66 U11.8
GMAC_TXEN: length 16.8
  BOTTOM w0.102: U5.66 37.75,3.72 40.51,6.48 40.51,12.67 40.33,12.86 U11.5
HPOUT: length 6.4
  TOP w0.203: C105.1 32.41,15.7 v1(31.81,15.1)
  BOTTOM w0.178: v1(31.81,15.1) 31.03,14.32 U5.44
I2C0_SCK: length 20
  TOP w0.102: U7.A3 23.27,21.13 22.42,21.97 20.98,21.97 20.6,21.59 v1(20.6,11.91)
  BOTTOM w0.102: R31.2 20.38,12.32 20.38,12.13 v1(20.6,11.91) 20.6,8.46 21.49,7.57 U5.12
I2C0_SDA: length 18.9
  TOP w0.102: v1(20.98,12.4) 20.98,21.29 21.26,21.56 22.37,21.56 22.88,21.06 22.88,20.57 U7.B3
  BOTTOM w0.102: U5.13 21.63,7.92 20.98,8.57 v1(20.98,12.4) 20.98,13.09 R30.2
IR_DET: length 22.7
  TOP w0.102: R37.1 C90.1 R38.2 29.23,29.64 28.79,29.2 28.79,22.67 30.34,21.12 30.34,16.34 29.23,15.24 28.43,15.24 28.18,14.99 28.18,14.33 27.02,13.17 v1(27.02,12.75)
  BOTTOM w0.102: v1(27.02,12.75) 26.83,12.56 U5.32
IRCUTN: length 19.6
  TOP w0.102: U10.5 16.76,5.77 16.95,5.58 16.95,4 R32.1 17.87,3.08 v1(17.87,1.24)
  BOTTOM w0.102: v1(17.87,1.24) 18.1,1.02 29.55,1.02 30.68,2.14 U5.68
IRCUTP: length 25.6
  TOP w0.102: 17.17,9.58 17.27,9.47 ; 17.17,9.58 U10.8 ; 17.17,9.58 17.27,9.68 ; 17.27,9.47 17.27,9.68 ; 17.27,9.47 17.27,4.66 18.25,3.68 18.25,1.66 v1(18.51,1.4) ; R29.1 17.27,12.08 17.27,9.68
  BOTTOM w0.102: v1(18.51,1.4) 18.67,1.24 29.28,1.24 30.33,2.29 U5.69
IRLED_EN: length 47.2
  TOP w0.102: U4.4 9.97,29.8 9.63,30.14 R60.2 7.39,30.14 6.85,29.6 6.85,26.15 7.48,25.53 16.84,25.53 17.55,24.82 17.55,4.85 18.59,3.81 18.59,2.15 19.08,1.65 19.77,1.65 20.04,1.92 v1(20.04,2.49)
  BOTTOM w0.102: v1(20.04,2.49) 21.24,2.49 22.47,3.72 U5.1
LED: length 2.5
  TOP w0.102: v1(35.25,12.86) 35.87,12.86 R41.1 35.9,13.22 R40.1
  BOTTOM w0.102: U11.20 v1(35.25,12.86)
LINK/ACT: length 5
  BOTTOM w0.102: U11.11 38.42,8.12 37.99,7.7 R43.1 R49.2
MDI_RN: length 14.1
  BOTTOM w0.104: U11.26 36.89,15.1 36.89,15.8 36.62,16.07 32.78,16.07 31.06,17.8 31.06,19.96 31.72,20.62 31.72,21.46 31.61,21.56 D5.2 30.55,21.81 U12.8
MDI_RP: length 14.1
  BOTTOM w0.104: U12.6 33.09,21.76 D5.1 32.08,21.56 31.98,21.46 31.98,20.51 31.31,19.85 31.31,17.91 32.89,16.33 36.72,16.33 37.15,15.9 37.15,15.1 U11.27
MDI_TN: length 9.2
  BOTTOM w0.104: U12.3 36.9,21.81 D4.2 37.99,21.54 38.09,21.44 38.09,15.1 U11.29
MDI_TP: length 9.1
  BOTTOM w0.104: U11.30 38.35,15.1 38.35,21.44 38.46,21.54 D4.1 39.44,21.71 U12.1
MICP: length 13.2
  TOP w0.203: v1(31.37,16.13) 31.37,20.12 33.35,22.1 C102.1
  BOTTOM w0.203: v1(31.37,16.13) 29.98,14.74 U5.41
MII: length 1.4
  BOTTOM w0.102: R39.1 40.81,13.27 39.81,13.27 U11.4
MIPI_AVD08: length 4.4
  TOP w0.305: v1(25.83,11.02) 24.38,11.02 24.15,10.79 C53.1 24.04,9.88 FB6.1
  BOTTOM w0.178: v1(25.83,11.02) 26.13,11.32 U5.30
MIPI_AVD18: length 2.9
  TOP w0.254: FB7.1 C54.1
  TOP w0.305: v1(26.48,11.04) 26.48,10.64 26.01,10.17 C54.1
  BOTTOM w0.178: U5.31 v1(26.48,11.04)
MIPI_CLKN: length 8.6
  TOP w0.104: U7.E4 24.33,17.9 24.33,15.64 v1(24.58,15.39)
  BOTTOM w0.104: U5.26 24.77,11.94 24.77,14.17 25.3,14.7 25.3,15.59 25.02,15.88 24.45,15.88 24.35,15.77 24.35,15.62 v1(24.58,15.39)
MIPI_CLKP: length 8.7
  TOP w0.104: U7.F4 24.08,17.51 24.08,15.64 v1(23.83,15.39)
  BOTTOM w0.104: U5.27 25.03,11.94 25.03,14.06 25.56,14.59 25.56,15.7 25.12,16.13 24.34,16.13 24.09,15.88 24.09,15.65 v1(23.83,15.39)
MIPI_DATAN0: length 8
  TOP w0.104: v1(24.07,14.65) 24.32,14.4 24.85,14.4 25.26,14.81 25.26,16.62 24.89,16.99 24.89,17.43 U7.F5
  BOTTOM w0.104: v1(24.07,14.65) 23.83,14.4 23.55,14.4 23.3,14.15 23.3,13.24 24.07,12.46 24.07,11.94 U5.24
MIPI_DATAN1: length 11
  TOP w0.104: U7.E3 23.6,17.91 23.6,16.82 23.14,16.36 23.14,13.93 24.14,12.93 25.66,12.93 26,13.27 26,13.59 v1(25.76,13.84)
  BOTTOM w0.104: v1(25.76,13.84) 26,13.59 26,13.28 25.47,12.75 25.47,11.94 U5.28
MIPI_DATAP0: length 8.8
  TOP w0.104: U7.E5 25.15,17.82 25.15,17.1 25.52,16.73 25.52,14.7 24.96,14.14 24.32,14.14 v1(24.07,13.9)
  BOTTOM w0.104: U5.25 24.33,11.94 24.33,12.57 23.55,13.35 23.55,14.04 23.66,14.15 23.83,14.15 v1(24.07,13.9)
MIPI_DATAP1: length 11.1
  TOP w0.104: v1(26.5,13.84) 26.26,13.59 26.26,13.16 25.77,12.67 24.03,12.67 22.88,13.82 22.88,16.46 23.34,16.93 23.34,17.52 U7.F3
  BOTTOM w0.104: v1(26.5,13.84) 26.26,13.59 26.26,13.17 25.73,12.64 25.73,11.94 U5.29
MIPI_MCLK: length 11.7
  TOP w0.102: U7.C2 22.21,19.2 22.21,16.7 22.07,16.56 v1(22.07,14.38)
  BOTTOM w0.102: v1(22.07,14.38) 22.07,12.95 21.76,12.65 21.76,9.37 22.17,8.97 U5.16
PLL_VDDHV: length 2.7
  TOP w0.305: v1(23.75,5.16) 23.49,4.9 C48.1 22.96,4.98 FB4.1
  BOTTOM w0.178: U5.6 23.43,5.47 v1(23.75,5.16)
PPRST_N: length 4.8
  TOP w0.102: R15.2 C26.1 20.15,7.63 v1(20.15,6.93)
  BOTTOM w0.102: v1(20.15,6.93) 20.77,6.93 21.71,6 22.2,5.82 U5.7
PWDN: length 2.3
  TOP w0.102: R33.2 24,23.08 U7.A4
RX+: length 1.9
  BOTTOM w0.254: J6.3 32.44,33.7 33.09,33.05 U12.11
RX-: length 1.9
  BOTTOM w0.254: U12.9 30.55,33.02 31.19,33.65 J6.4
SENSOR_RESET: length 22.8
  TOP w0.102: U7.C4 23.64,19.89 23.64,21.21 22.48,22.38 20.75,22.38 20.24,21.87 20.24,13.56 C70.1 R34.2 20.11,12.22 v1(20.11,11.46)
  BOTTOM w0.102: U5.11 21.37,7.22 20.11,8.47 v1(20.11,11.46)
SFC_CS_N: length 4.8
  TOP w0.102: U6.1 33.13,9.23 32.99,9.37 v1(32.99,11.33) R17.2
  BOTTOM w0.102: v1(32.99,11.33) 32.43,11.33 32.17,11.07 U5.45
SFC_DR: length 4.7
  TOP w0.102: U6.2 33.11,7.96 32.58,8.48 v1(32.58,10.9)
  BOTTOM w0.102: v1(32.58,10.9) 32.4,10.72 U5.46
SFC_DT: length 13.7
  TOP w0.102: v1(33.38,10.67) 33.37,10.66 33.37,9.96 33.5,9.83 34.79,9.83 35.12,9.5 35.12,6.58 36.03,5.68 40.15,5.68 40.41,5.42 U6.5
  BOTTOM w0.102: v1(33.38,10.67) 33.08,10.37 U5.47
SFC_SCLK: length 13.1
  TOP w0.102: v1(33.77,10.22) 34.88,10.22 35.45,9.65 35.45,6.68 36.11,6.02 39.8,6.02 40.47,6.69 U6.6
  BOTTOM w0.102: U5.48 33.56,10.02 v1(33.77,10.22)
SID: length 2.3
  TOP w0.102: R35.2 24.86,20.97 U7.A5
SPEED: length 3
  BOTTOM w0.102: R48.2 R45.1 37.84,9.47 38.02,9.66 U11.12
TX+: length 9.3
  L2_PWR w0.254: v1(39.44,33.37) 38.68,33.37 38.43,33.62 38.43,34.37 37.85,34.95 36.24,34.95 35.3,34.01 34.82,34.01 34.57,34.26 34.57,34.62 v1(34.94,34.99)
  BOTTOM w0.254: J6.1 v1(34.94,34.99) ; U12.16 v1(39.44,33.37)
TX-: length 9.3
  L2_PWR w0.254: v1(36.9,33.37) 37.66,33.37 37.92,33.62 37.92,34.16 37.64,34.44 36.45,34.44 35.51,33.5 34.61,33.5 34.06,34.05 34.06,34.62 v1(33.69,34.99)
  BOTTOM w0.254: U12.14 v1(36.9,33.37) ; J6.2 v1(33.69,34.99)
UART1_RXD: length 16.8
  BOTTOM w0.102: U5.73 28.93,2.07 28.33,1.47 19.12,1.47 18.6,1.99 16.58,1.99 16.02,2.55 14.68,2.55 14.57,2.44 J12.2
UART1_TXD: length 17.6
  BOTTOM w0.102: J12.3 13.32,2.45 13.65,2.78 16.18,2.78 16.71,2.25 18.67,2.25 19.22,1.7 28.09,1.7 28.58,2.19 U5.74
USB_AVD33: length 50.8
  TOP w0.178: C30.2 40.34,9.47 40.59,9.23 U6.8 ; C30.2 40.34,11.01 40.59,11.25 v1(41.4,11.25) ; C30.2 R18.2
  TOP w0.254: 8.96,16.99 8.68,16.71 ; 8.96,16.99 8.81,17.14 ; 8.96,16.99 R27.1 ; v1(29.33,12.88) 29.33,13.11 C56.1 28.85,13.11 v1(28.85,12.88)
  TOP w0.305: v1(36.04,10.49) 35.2,11.33 R17.1 ; v1(24.23,3.73) 24.09,3.59 20.25,3.59 18.93,4.91 18.93,6.5 18.28,7.15 v1(18.28,15.44) ; R40.2 35,14.27 v1(32.88,14.27) ; R16.1 33.05,3.17 v1(33.05,2.93) 32.72,2.93 32.33,3.33 32.33,6.93 v1(32.67,7.28)
  BOTTOM w0.178: 28.58,12.42 U5.37 ; v1(7.69,12.55) 7.7,12.54 U3.4 ; U11.13 v1(37.62,10.36) ; U5.56 32.49,7.22 32.55,7.28 v1(32.67,7.28) ; v1(29.33,12.88) 29.63,12.58 U5.40 ; v1(41.4,12.01) 41.4,12.21 R39.2 ; U5.84 25.08,3.37 24.71,3.73 v1(24.23,3.73)
  BOTTOM w0.254: 16.06,15.86 R28.1 ; 16.06,15.86 16.21,15.71 ; 16.06,15.86 15.86,15.66 ; R5.1 7,11.68 7.18,11.86 ; v1(28.85,12.88) 28.58,12.6 28.58,12.42 ; 7.06,18.33 6.88,18.5 C12.1 R6.1
  BOTTOM w0.305: R47.2 v1(41.5,18.24) ; R13.1 v1(33.05,2.93) ; v1(32.88,14.27) R44.2 ; FB9.2 v1(41.12,18.64)
  BOTTOM w0.381: C110.1 24.65,28.59 v1(25.14,28.59) ; R61.2 24.33,29.41 24.46,29.29
  vias: v1(7.72,13.61) v1(7.9,14.3) v1(8.53,14.27) v1(25.14,29.16)
USB_DM0: length 30.4
  BOTTOM w0.13: J11.3 15.25,33.77 15.72,33.3 15.72,30.05 19.63,26.14 24.79,26.14 27.9,23.02 27.9,12.57 27.88,12.55 U5.35
USB_DP0: length 30.4
  BOTTOM w0.13: U5.36 28.23,12.55 28.2,12.57 28.2,23.15 24.91,26.44 19.76,26.44 16.02,30.17 16.02,33.27 16.5,33.75 J11.2
VREF: length 2.4
  TOP w0.305: U7.D7 28.17,18.89 C87.1
VREFH: length 3.5
  TOP w0.305: D2.2 28.43,16.95 C88.1 28.33,18.24 U7.E7
VREFN2: length 2.2
  TOP w0.305: U7.F7 27.3,16.47 C89.1
WIFI_3V3: length 1.1
  BOTTOM w0.254: 20.09,32.51 20.32,32.28 ; 20.32,32.28 C109.1 ; 20.32,32.28 20.07,32.04
WIFI_PWR_EN_N: length 48.6
  TOP w0.102: v1(19.48,2.15) 19.48,3.43 17.8,5.11 17.8,25.04 24.28,31.52 v1(26.34,31.52)
  BOTTOM w0.102: v1(19.48,2.15) 19.62,2.01 25.5,2.01 25.78,2.29 U5.82
  BOTTOM w0.127: R64.2 22.75,30.89 Q1.1 ; R64.2 C109.2 ; R64.2 R61.1 26.12,32.28 26.34,32.07 v1(26.34,31.52)
N3362923: length 39
  TOP w0.102: v1(29.2,27.14) 29.2,25.79 31.12,23.86 32.17,23.86 33.16,24.85 36.46,24.85 37.92,23.39 39.21,23.39 39.67,22.94 39.67,21.01 40.23,20.45 40.23,16.04 39.26,15.07 39.26,11.73 38.82,11.29 37.32,11.29 36.7,10.67 36.7,8.94 36.34,8.59 v1(35.89,8.59)
  BOTTOM w0.102: v1(29.2,27.14) 29.2,27.23 28.69,27.74 J6.6 ; R48.1 v1(35.89,8.59)
N3362941: length 43
  TOP w0.102: v1(29.71,25.94) 31.48,24.17 32.04,24.17 32.99,25.12 36.6,25.12 38.02,23.7 39.34,23.7 40,23.04 40,20.98 40.46,20.52 40.46,15.9 39.52,14.96 39.52,11.58 38.96,11.02 37.4,11.02 36.95,10.58 36.95,7.16 36.6,6.81 v1(35.91,6.81)
  BOTTOM w0.102: R49.1 v1(35.91,6.81) ; J6.8 26.19,33.24 26.31,33.11 28.11,33.11 28.33,32.89 28.33,27.32 v1(29.71,25.94)
N15378796: length 3.1
  BOTTOM w0.102: U11.28 37.62,16.75 C94.1 37.35,17.71 C93.1
N15378850: length 2
  TOP w0.178: C96.2 38.17,25.13 v1(38.17,24.46)
  BOTTOM w0.178: U12.2 v1(38.17,24.46)
N15378882:
  vias: v1(34.74,30.66) v1(35.28,30.66) v1(35.84,30.66)
N15378968: length 3.4
  TOP w0.178: C95.2 32.95,25.95 v1(31.82,24.82)
  BOTTOM w0.178: U12.7 v1(31.82,24.82)
N15379500: length 2.1
  BOTTOM w0.102: 34.59,15.09 34.79,15.29 36.34,15.29 36.42,15.21 U11.25
N16529866: length 5
  TOP w0.102: U6.3 34.59,6.69 35.67,5.61 35.67,4.11 35.24,3.68 R16.2
N16529875: length 4.6
  TOP w0.102: R18.1 38.57,8.6 39.2,7.96 U6.7
